# Altium PCB IMX6.PcbDoc (part 1 of 3)
Units mil, origin at the board's own origin, x right, y up, seen from the top; angles counter-clockwise.
Board outline 7950 x 5550 mil, 4 copper layers (Top Layer, GND, VCC, Bottom Layer), stack 30.634 mil thick; 256 components, 328 nets, 1056 pads, 386 vias.
Unrouted connection lines stored in the file: 1.
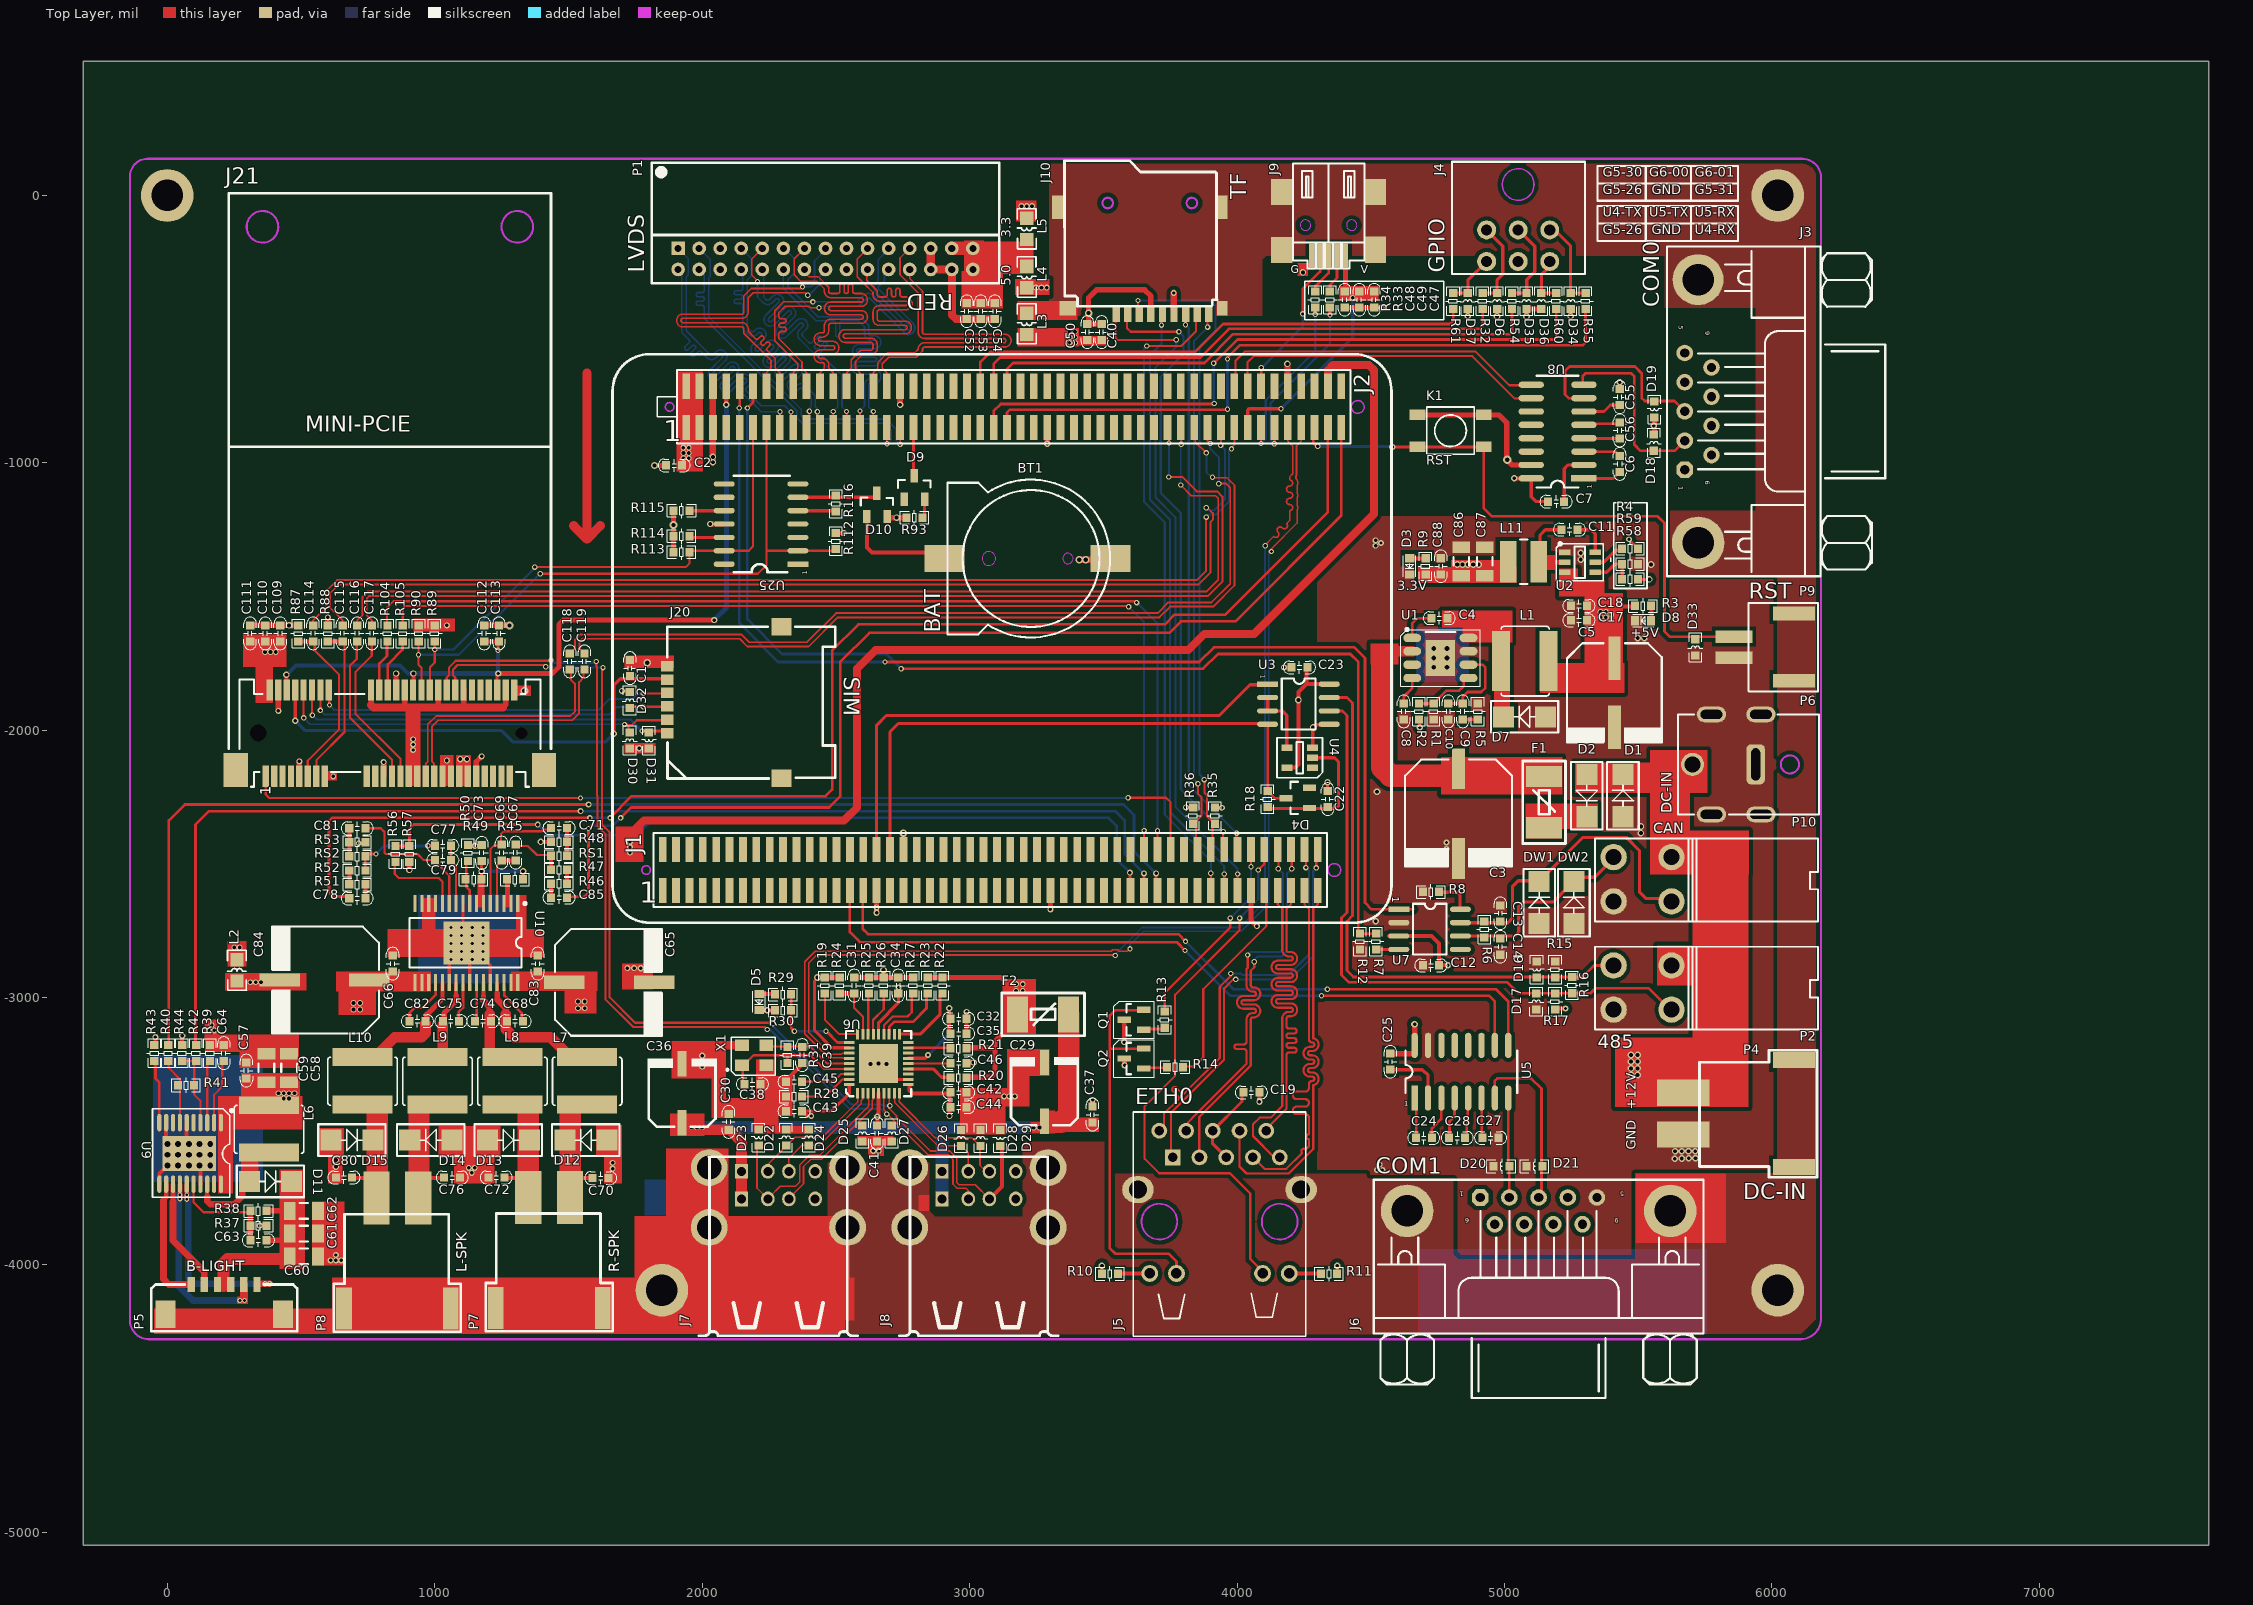
[diagram p0: Top Layer view]
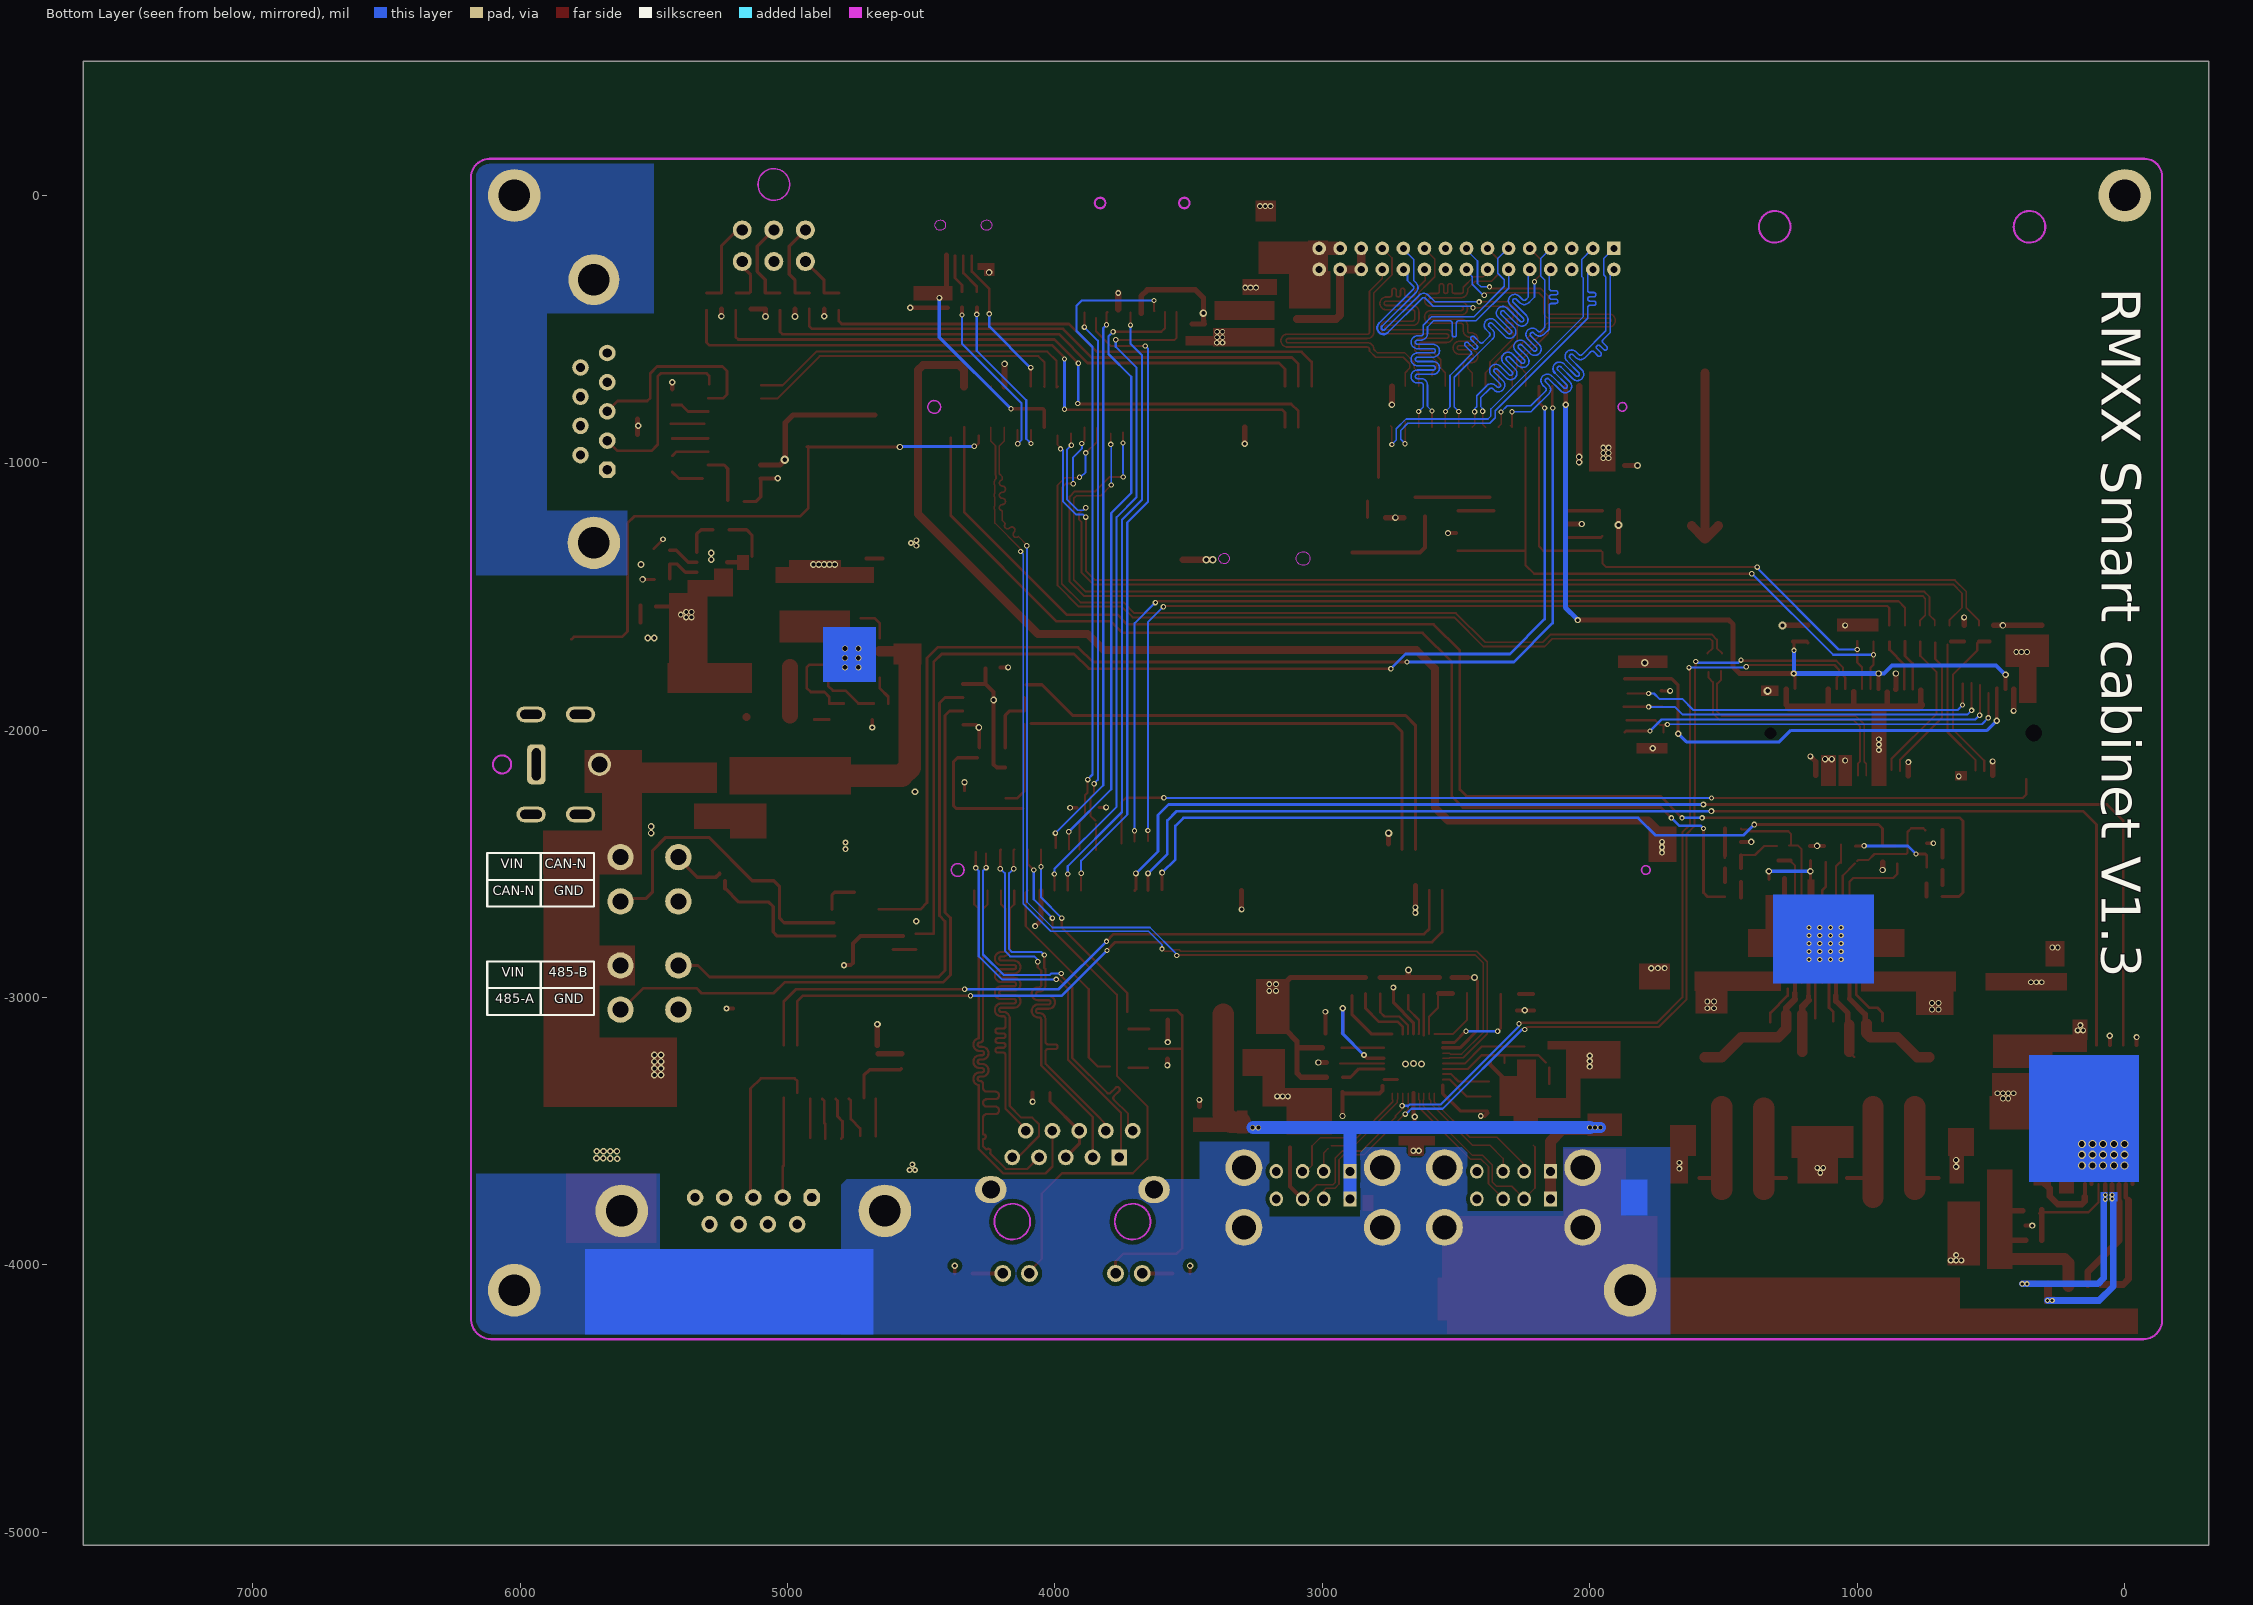
[diagram p1: Bottom Layer view, seen from below]
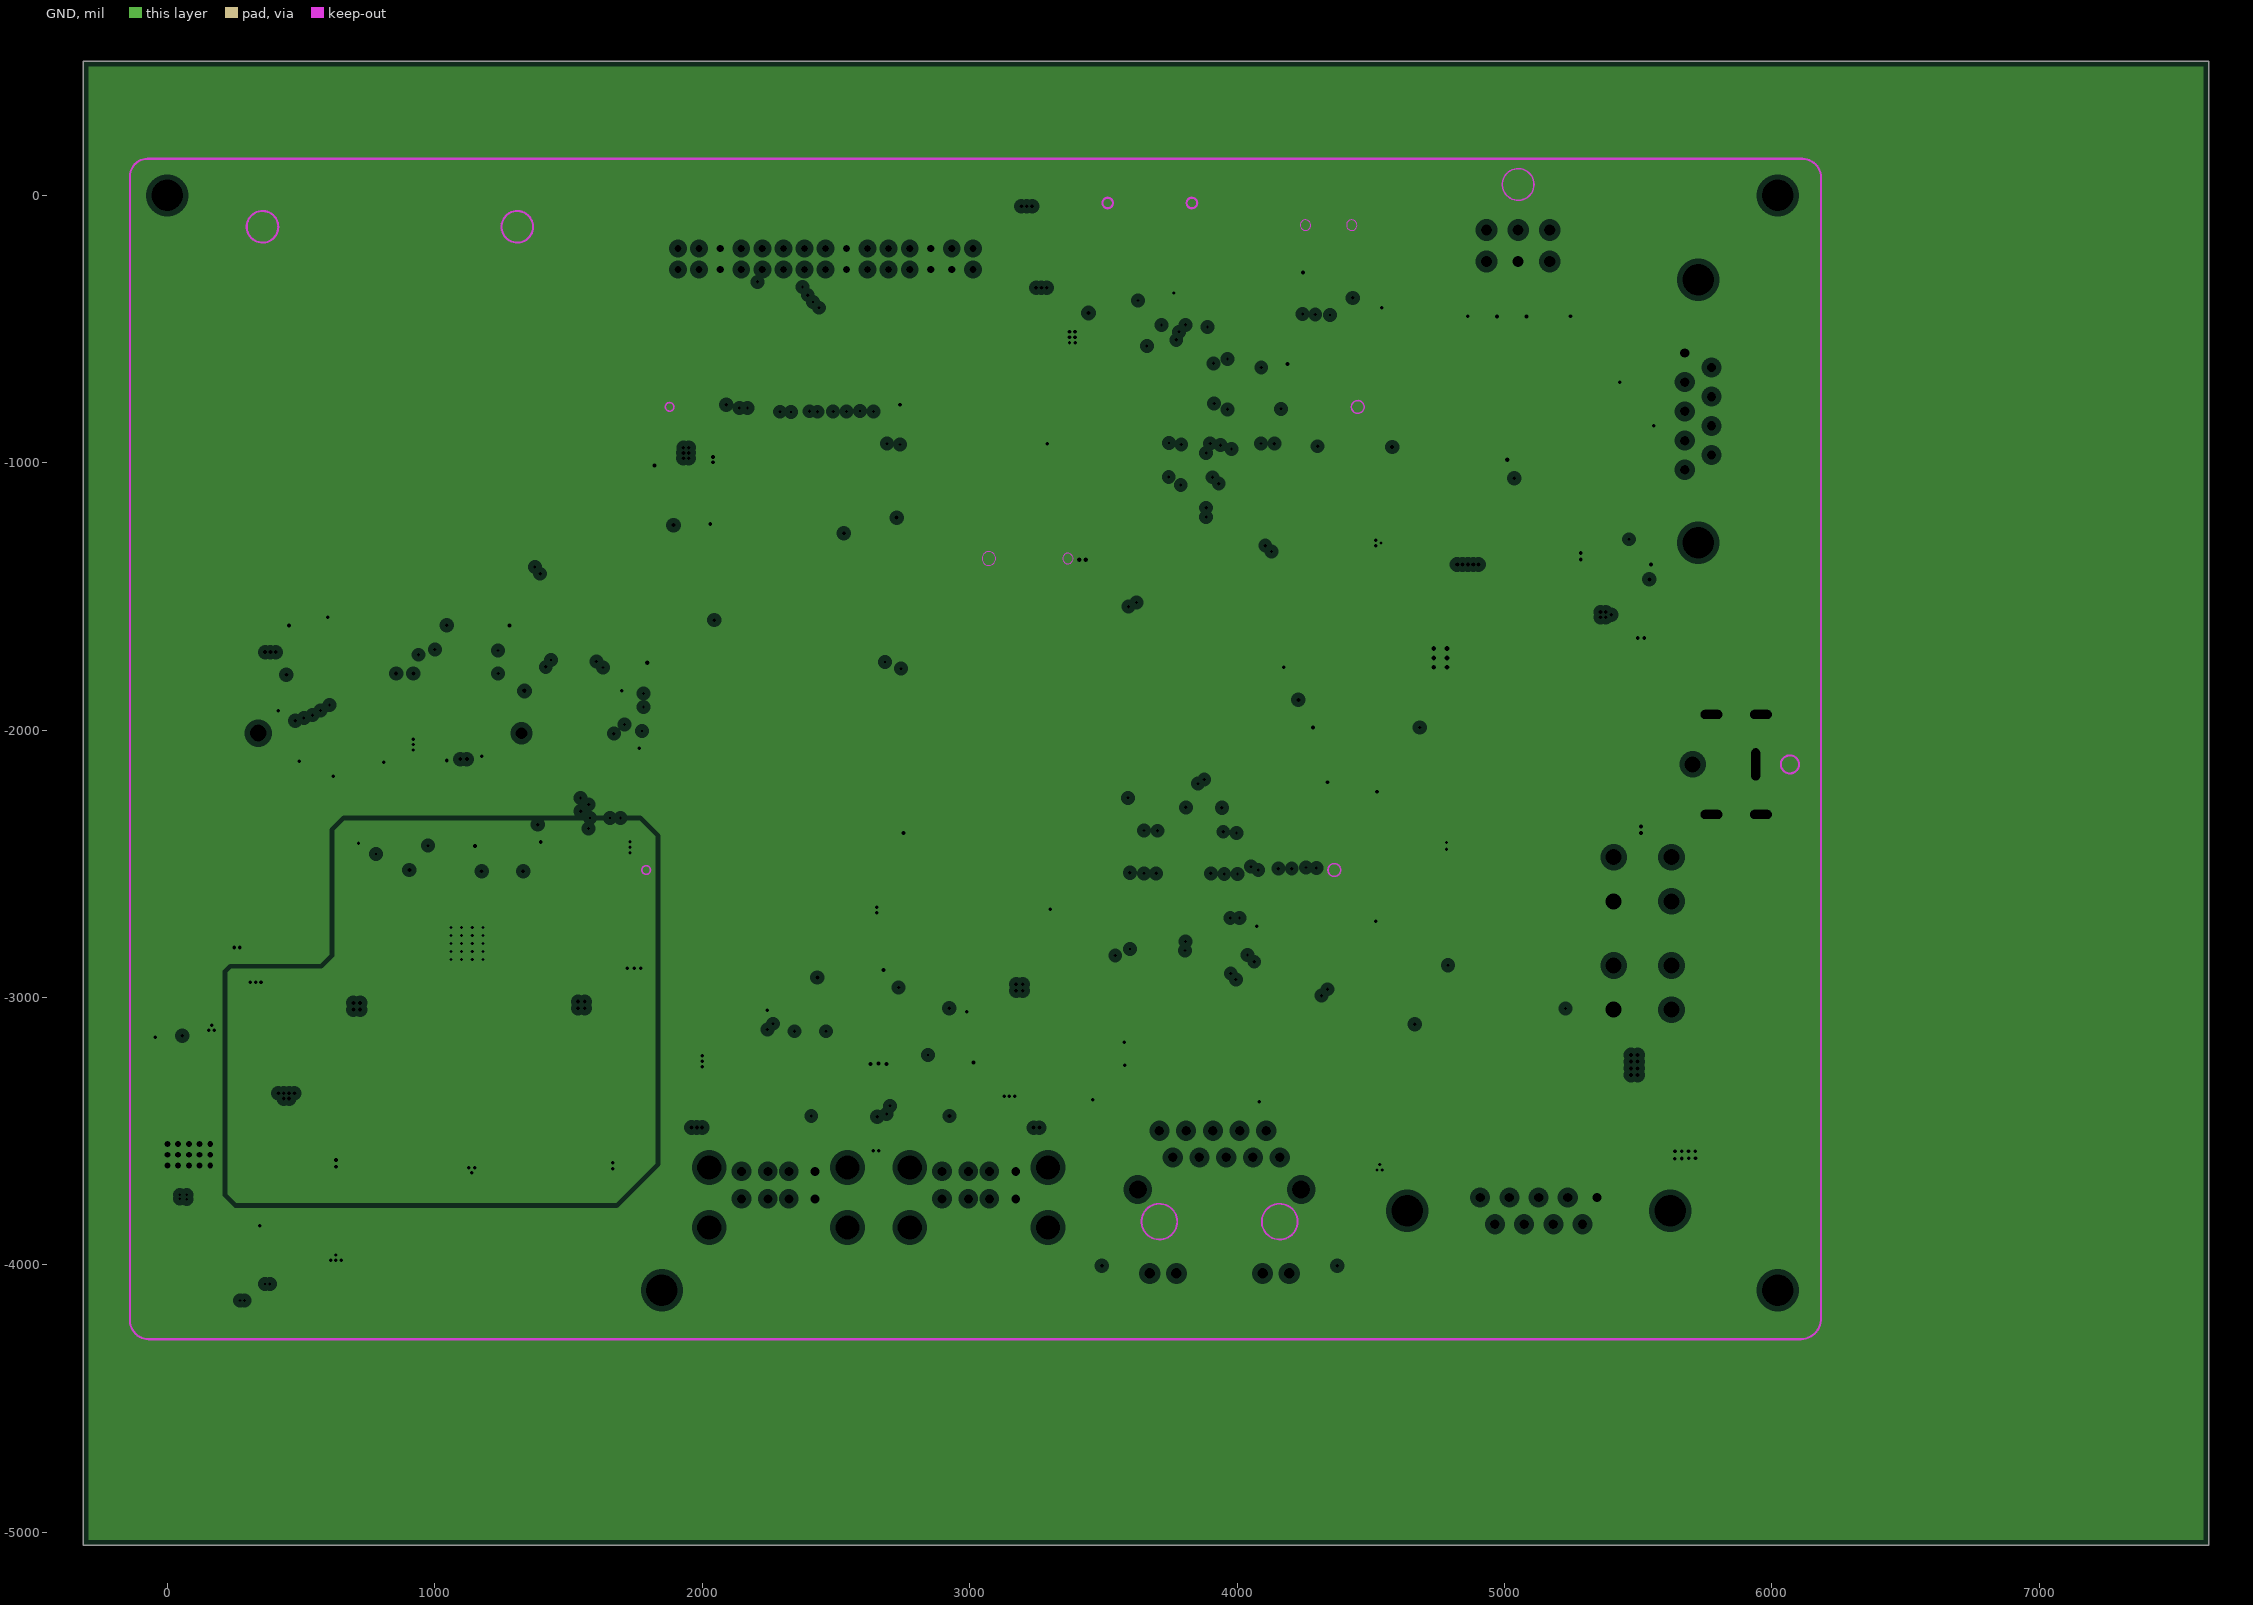
[diagram p2: GND, clearances drawn from the general rule]
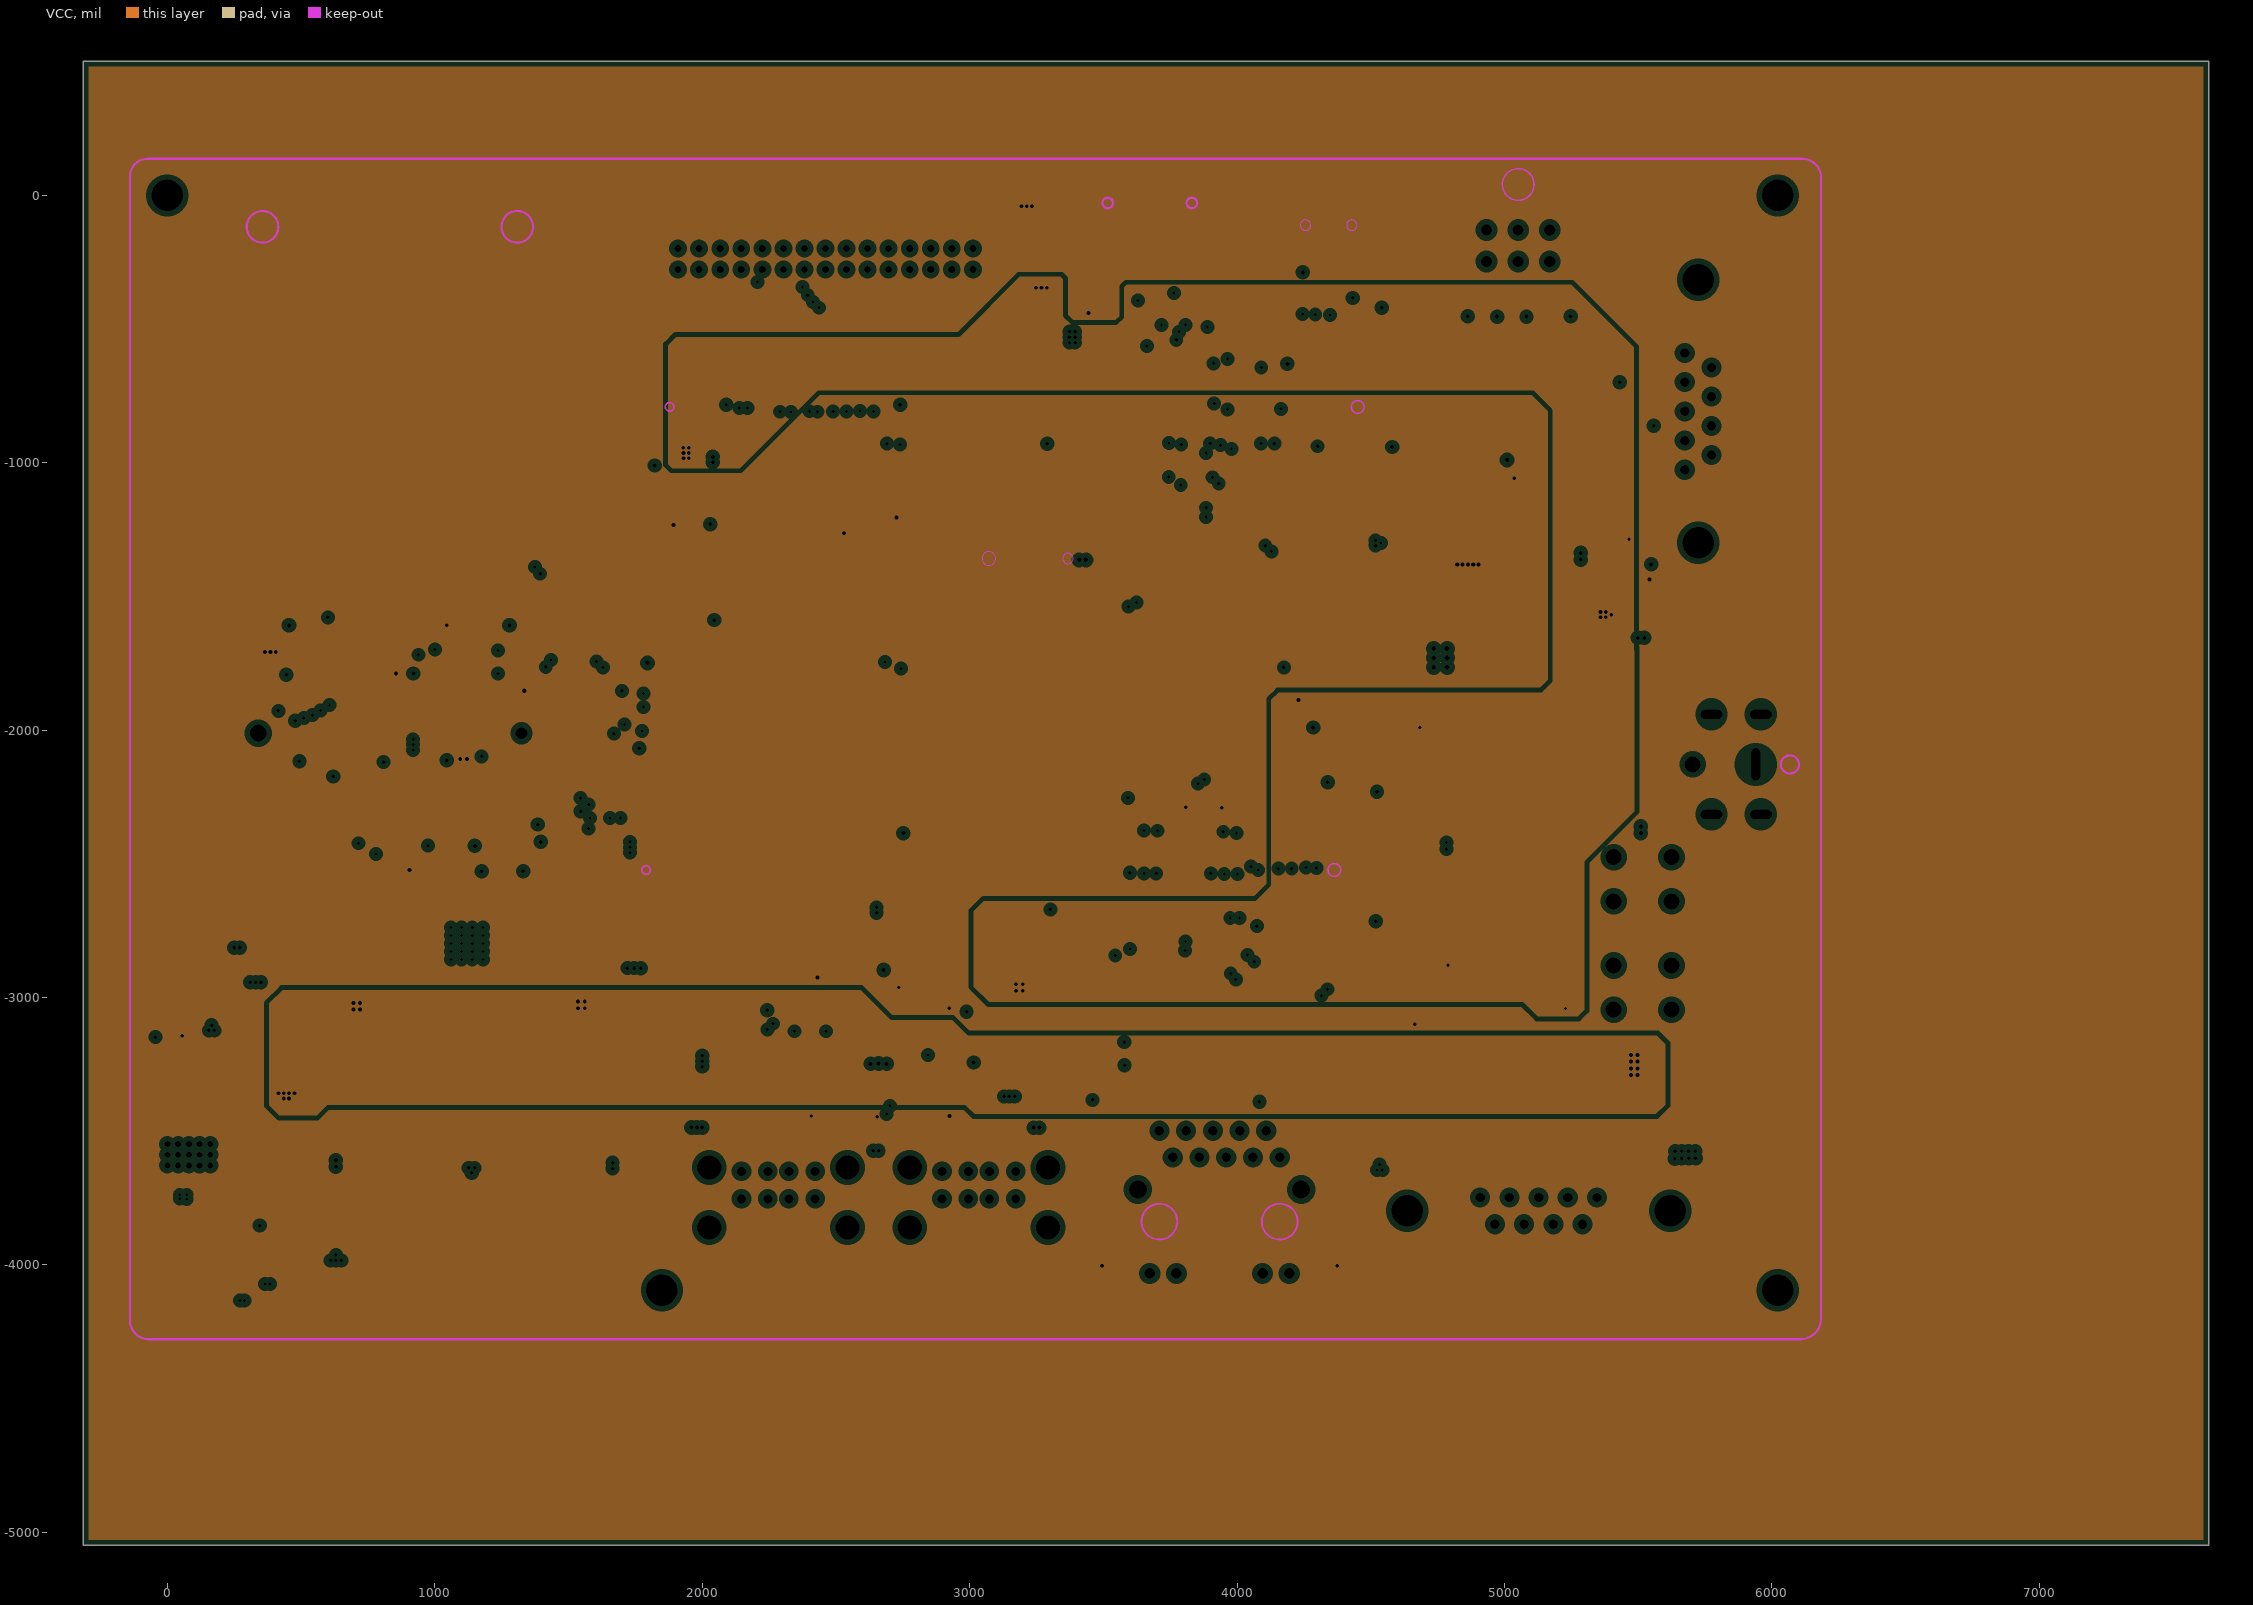
[diagram p3: VCC, clearances drawn from the general rule]

## Layer stack, top to bottom
Top Layer: signal copper 1.4
Dielectric: core 10, FR-4, Dk 4.2
GND: plane copper 1.417, net (Multiple Nets)
Dielectric: prepreg 5, Dk 4.2
VCC: plane copper 1.417, net (Multiple Nets)
Dielectric: core 10, Dk 4.2
Bottom Layer: signal copper 1.4

## Board outline
-315.52,502 7634.48,502 7634.48,-5048 -315.52,-5048

## Design rules (kind name [scope] priority, off if disabled: settings)
Clearance [All] p1 off: gap=15
ComponentClearance [All] p1 off: gap=0 collisioncheckmode=3 verticalgap=0
DiffPairsRouting [All] p1: maxlimit=10 minlimit=8 mostfreqgap=8 maxuncoupledlength=500
HoleSize [All] p1: absolutevalues=TRUE maxlimit=300 minlimit=1 maxpercent=80.000 minpercent=20.000
PlaneClearance [All] p1: clearance=20
PlaneConnect [All] p1: planeconnectstyle=Direct reliefexpansion=20 reliefentries=4 reliefconductorwidth=12 reliefairgap=10
PolygonConnect [All] p1: connectstyle=Direct reliefconductorwidth=15 reliefentries=4 polygonreliefangle="90 Angle"
RoutingVias [All] p1: holewidth=12 width=20 viastyle="Through Hole" minholewidth=8 minwidth=16 maxholewidth=200 maxwidth=300
SolderMaskExpansion [All] p1: expansion=4
TestPointUsage FabricationTestPointUsage [All] p1: valid=0 allowmultiple=FALSE
Testpoint FabricationTestpoint [(IsPad And (OnTopLayer Or OnBottomLayer))] p1: side=3 testpointundercomponent=TRUE minsize=40 maxsize=100 preferedsize=60 minholesize=0 maxholesize=40 preferedholesize=32 testpointgrid=1 style=297 order=0-112345678
Width [All] p1: maxlimit=200 minlimit=6 preferedwidth=10 minimp=50.000000 maximp=50.000000 favimp=50.000000
14 further rules are at their usual default settings.

## Classes and differential pairs
component class 4.CAN: C12 C13 C14 DW1 DW2 P10 R6 R7 R8 R12 U7
component class 10.LVDS: C52 C53 C54 C57 C58 C59 C60 C61 C62 C63 C64 D11 L4 L5 L6 P1 P5 R37 R38 R39 R40 R41 R42 R43 R44 U9
component class 12.WTD&RTC: BT1 D9 D10 D33 K1 P9 R93 R112 R113 R114 R115 R116 U25
component class 8.SATA&TFCARD: C40 C50 J10 R35 R36
component class 5.USB: C29 C30 C31 C32 C34 C35 C36 C37 C38 C39 C41 C42 C43 C44 C45 C46 C47 C48 C49 D5 D22 D23 D24 D25 D26 D27 D28 D29 F2 J7 J8 J9 R19 R20 R21 R22 R23 R24 R25 R26 R27 R28 R29 R30 R31 R33 R34 U6 X1
component class 3.UART: C6 C7 C22 C23 C24 C25 C27 C28 C55 C56 D4 D16 D17 D18 D19 D20 D21 J3 J6 R15 R16 R17 R18 U3 U4 U5 U8
component class 2.ETH: C19 J5 Q1 Q2 R10 R11 R13 R14
component class 1.POWER: C3 C4 C5 C8 C9 C10 C11 C17 C18 C86 C87 C88 D1 D2 D3 D7 D8 F1 L1 L2 L3 L11 P2 P4 P6 R1 R2 R3 R4 R5 R9 R58 R59 U1 U2
component class 11.EX-MODULE: C65 C66 C67 C68 C69 C70 C71 C72 C73 C74 C75 C76 C77 C78 C79 C80 C81 C82 C83 C84 C85 D12 D13 D14 D15 L7 L8 L9 L10 P7 P8 R45 R46 R47 R48 R49 R50 R51 R52 R53 R56 R57 RS1 RS2 U10
component class 0.CONNECTOR: C2 D6 D34 D35 D36 D37 J1 J2 J4 R32 R54 R55 R60 R61
component class 7.MINIPCIE: C1 C109 C110 C111 C112 C113 C114 C115 C116 C117 C118 C119 D30 D31 D32 J20 J21 R87 R88 R89 R90 R104 R105
differential pair CAN1: +CAN1_P -CAN1_N
differential pair USB_PORT4: +USB_PORT4_P -USB_PORT4_N
differential pair USB_PORT3: +USB_PORT3_P -USB_PORT3_N
differential pair USB_PORT2: +USB_PORT2_P -USB_PORT2_N
differential pair USB_PORT1: +USB_PORT1_P -USB_PORT1_N
differential pair USB_OTG_D: +USB_OTG_D_P -USB_OTG_D_N
differential pair USB_H1_D: +USB_H1_D_P -USB_H1_D_N
differential pair TRX3: +TRX3_P -TRX3_N
differential pair TRX2: +TRX2_P -TRX2_N
differential pair TRX1: +TRX1_P -TRX1_N
differential pair TRX0: +TRX0_P -TRX0_N
differential pair LVDS1_TX3: +LVDS1_TX3_P -LVDS1_TX3_N
differential pair LVDS1_TX2: +LVDS1_TX2_P -LVDS1_TX2_N
differential pair LVDS1_TX1: +LVDS1_TX1_P -LVDS1_TX1_N
differential pair LVDS1_TX0: +LVDS1_TX0_P -LVDS1_TX0_N
differential pair LVDS1_CLK: +LVDS1_CLK_P -LVDS1_CLK_N
differential pair LVDS0_TX3: +LVDS0_TX3_P -LVDS0_TX3_N
differential pair LVDS0_TX2: +LVDS0_TX2_P -LVDS0_TX2_N
differential pair LVDS0_TX1: +LVDS0_TX1_P -LVDS0_TX1_N
differential pair LVDS0_TX0: +LVDS0_TX0_P -LVDS0_TX0_N
differential pair LVDS0_CLK: +LVDS0_CLK_P -LVDS0_CLK_N
differential pair CLK1O: +CLK1O_P -CLK1O_N
differential pair CLK1: +CLK1_P -CLK1_N
differential pair PCIE_RXO: +PCIE_RXO_P -PCIE_RXO_N
differential pair PCIE_RX: +PCIE_RX_P -PCIE_RX_N
differential pair PCIE_TXO: +PCIE_TXO_P -PCIE_TXO_N
differential pair PCIE_TX: +PCIE_TX_P -PCIE_TX_N

## Components (designator, comment, footprint, x,y, rotation, side; value= is the part's Value field where it differs from the comment)
BT1 "" CR1220 3229.48,-1358 r180 top
C1 "0.1uF" 0603C 1729.48,-1768 r180 top
C2 "0.1uF" 0603C 1894.8,-1009.72 r270 top
C3 "1000uF/25V" C10-SMD 4828.48,-2310 r270 top
C4 "Cap" 0603C 4756.48,-1581 r270 top
C5 "Cap Pol3" C8X10-SMD 5411.48,-1860 r270 top
C6 "0.1uF" 0603C 5431.48,-1004 r180 top
C7 "0.1uF" 0603C 5193.48,-1145 r270 top
C8 "Cap" 0603C 4623.48,-1930 r0 top
C9 "Cap" 0603C 4844.48,-1930 r180 top
C10 "Cap" 0603C 4790.48,-1930 r180 top
C11 "0.1uF" 0603C 5243.48,-1250 r90 top
C12 "0.1uF" 0603C 4725,-2880 r270 top
C13 "22pF" 0603C 4985,-2685 r0 top
C14 "22pF" 0603C 4985,-2810 r180 top
C17 "10uF" 0603C 5278.48,-1589 r270 top
C18 "0.1uF" 0603C 5278.48,-1535 r270 top
C19 "0.1uF" 0603C 4053.48,-3355 r90 top
C22 "1nF" 0603C 4339.48,-2258 r0 top
C23 "0.1uF" 0603C 4233.48,-1765 r270 top
C24 "0.1uF" 0603C 4698.48,-3525 r90 top
C25 "0.1uF" 0603C 4573.48,-3240 r180 top
C27 "0.1uF" 0603C 4948.48,-3525 r90 top
C28 "0.1uF" 0603C 4823.48,-3525 r90 top
C29 "220uF/16V" C6.3X5.4-SMD 3279.48,-3353 r90 top
C30 "0.1uF" 0603C 2098.48,-3465 r0 top
C31 "0.1uF" 0603C 2568.48,-2955 r0 top
C32 "4.7uF" 0603C 2958.48,-3080 r270 top
C34 "4.7uF" 0603C 2733.48,-2955 r0 top
C35 "0.1uF" 0603C 2958.48,-3135 r270 top
C36 "220uF/16V" C6.3X5.4-SMD 1924.48,-3358 r90 top
C37 "0.1uF" 0603C 3459.48,-3438 r0 top
C38 "22pF" 0603C 2187.48,-3324 r270 top
C39 "22pF" 0603C 2373.48,-3215 r180 top
C40 "0.1uF" 0603C 3493.48,-511 r180 top
C41 "0.1uF" 0603C 2653.48,-3508 r180 top
C42 "0.1uF" 0603C 2958.48,-3355 r270 top
C43 "0.1uF" 0603C 2343.48,-3425 r90 top
C44 "4.7uF" 0603C 2958.48,-3410 r270 top
C45 "1uF" 0603C 2343.48,-3315 r90 top
C46 "1uF" 0603C 2958.48,-3245 r270 top
C47 "0.1uF" 0603C 4512.48,-390 r180 top
C48 "22uF" 0603C 4402.48,-390 r180 top
C49 "22uF" 0603C 4457.48,-390 r180 top
C50 "22uF" 0603C 3440.48,-511 r180 top
C52 "0.1uF" 0603C 2989.48,-433 r0 top
C53 "22uF" 0603C 3041.48,-433 r180 top
C54 "22uF" 0603C 3094.48,-433 r180 top
C55 "0.1uF" 0603C 5431.48,-754 r180 top
C56 "0.1uF" 0603C 5431.48,-879 r180 top
C57 "Cap" 0603C 294.48,-3273 r180 top
C58 "Cap" C1206 454.48,-3263 r270 top
C59 "Cap" C1206 369.48,-3263 r270 top
C60 "Cap" C1206 509.48,-3968 r180 top
C61 "Cap" C1206 509.48,-3883 r180 top
C62 "Cap" C1206 509.48,-3798 r180 top
C63 "Cap" 0603C 339.48,-3908 r90 top
C64 "Cap" 0603C 210.48,-3208 r0 top
C65 "1000uF/25V" C10-SMD 1649.48,-2943 r0 top
C66 "0.22uF" 0603C 842,-2873 r180 top
C67 "1uF" 0603C 1301.48,-2458 r0 top
C68 "0.22uF" 0603C 1299.48,-3088 r270 top
C69 "300" 0603C 1249.48,-2458 r180 top
C70 "1uF" 0603C 1620,-3675 r270 top
C71 "1uF" 0603C 1464.48,-2366 r270 top
C72 "1uF" 0603C 1229.48,-3673 r270 top
C73 "1uF" 0603C 1175.48,-2459 r0 top
C74 "0.22uF" 0603C 1179.48,-3088 r90 top
C75 "0.22uF" 0603C 1059.48,-3088 r270 top
C76 "1uF" 0603C 1064.48,-3673 r270 top
C77 "1uF" 0603C 1029.48,-2433 r90 top
C78 "10uF" 0603C 709.48,-2629 r90 top
C79 "300" 0603C 1029.48,-2486 r270 top
C80 "1uF" 0603C 659.48,-3673 r270 top
C81 "1uF" 0603C 709.48,-2367 r90 top
C82 "0.22uF" 0603C 934.48,-3088 r90 top
C83 "0.22uF" 0603C 1384.48,-2873 r180 top
C84 "1000uF/25V" C10-SMD 590,-2935 r180 top
C85 "10uF" 0603C 1464.48,-2626 r270 top
C86 "47uF" C1206 4838.48,-1369 r90 top
C87 "47uF" C1206 4926.48,-1369 r90 top
C88 "0.1uF" 0603C 4762.48,-1387 r180 top
C109 "0.1uF" 0603C 421.48,-1638 r180 top
C110 "0.1uF" 0603C 365.48,-1638 r180 top
C111 "22uF" 0603C 308.48,-1638 r180 top
C112 "0.1uF" 0603C 1184.48,-1638 r180 top
C113 "0.1uF" 0603C 1239.48,-1638 r180 top
C114 "0.1uF" 0603C 544.48,-1638 r0 top
C115 "0.1uF" 0603C 654.48,-1638 r0 top
C116 "0.1uF" 0603C 709.48,-1638 r0 top
C117 "0.1uF" 0603C 764.48,-1638 r0 top
C118 "0.1uF" 0603C 1504.48,-1743 r0 top
C119 "0.1uF" 0603C 1559.48,-1743 r0 top
D1 "SMAJ16A" SMA 5443.48,-2245 r90 top
D2 "SS54" SMA 5308.48,-2245 r270 top
D3 "发光二极管" 0603D 4645.48,-1387 r180 top
D4 "BAT54C" SOT-23#1 4284.48,-2213 r0 top
D5 "发光二极管" 0603D 2212.48,-3017 r180 top
D6 "ESD" 0603L 4973.48,-395 r0 top
D7 "SS54" SMA 5075.48,-1950 r180 top
D8 "发光二极管" 0603D 5518.48,-1590 r90 top
D9 "BAT54C" SOT-23#2 2833.48,-1150 r270 top
D10 "BAT54C" SOT-23#2 2693.48,-1215 r270 top
D11 "SS210" SMA 384.48,-3688 r0 top
D12 "M7" SMA 1564.48,-3533 r180 top
D13 "M7" SMA 1274.48,-3533 r0 top
D14 "M7" SMA 984.48,-3533 r180 top
D15 "M7" SMA 689.48,-3533 r0 top
D16 "ESD" 0603L 5120,-2895 r180 top
D17 "ESD" 0603L 5120,-3015 r0 top
D18 "ESD" 0603L 5560,-925 r0 top
D19 "ESD" 0603L 5560,-800 r180 top
D20 "ESD" 0603L 4988.48,-3630 r90 top
D21 "ESD" 0603L 5112.48,-3630 r90 top
D22 "ESD" 0603L 2314.48,-3523 r0 top
D23 "ESD" 0603L 2209.48,-3523 r180 top
D24 "ESD" 0603L 2399.48,-3523 r0 top
D25 "ESD" 0603L 2599.48,-3508 r0 top
D26 "ESD" 0603L 2968.48,-3525 r0 top
D27 "ESD" 0603L 2709.48,-3508 r0 top
D28 "ESD" 0603L 3041.48,-3525 r0 top
D29 "ESD" 0603L 3113.48,-3525 r180 top
D30 "ESD" 0603L 1729.48,-2038 r0 top
D31 "ESD" 0603L 1799.48,-2038 r180 top
D32 "ESD" 0603L 1729.48,-1888 r0 top
D33 "ESD" 0603L 5715,-1690 r0 top
D34 "ESD" 0603L 5248.48,-395 r0 top
D35 "ESD" 0603L 5083.48,-395 r0 top
D36 "ESD" 0603L 5138.48,-395 r0 top
D37 "ESD" 0603L 4863.48,-395 r0 top
DW1 "SMAJ6.8CA" SMA 5130,-2645 r90 top
DW2 "SMAJ6.8CA" SMA 5260,-2645 r90 top
F1 "2A  FUSE" 1812F 5148.48,-2365 r90 top
F2 "2A  FUSE" 1812F 3179.48,-3063 r0 top
J1 "CON50X2" IDC50X2-1.27MM_SMT 3077,-2523 r0 top locked
J2 "CON50X2" IDC50X2-1.27MM_SMT 3164.8,-790.72 r0 top locked
J3 "DB9" DB-9/M#1 5674.48,-1026 r180 top
J4 "GPIO" 5557-6-small 5051.48,-129 r180 top (schematic designator GPIO)
J5 "48F-01GY2DPL2NL" RJ45C-48F-01GY2DPL2NL 3709.48,-3498 r0 top locked
J6 "DB9" DB-9/M#2 4909.48,-3748 r90 top
J7 "USB-D" USB-D 2284.48,-3748 r180 top
J8 "USB-D" USB-D 3034.48,-3748 r180 top
J9 "USB_AB" "MINI USB B" 4342.48,-225 r180 top locked
J10 "TF-CARD" TF-CARD 3605.48,-370 r270 top
J20 "MICRO-SIM" MACRO-SIM 2296.48,-1613 r270 top
J21 "Mini PCI Express" MINI-PCIE 831.48,-2011 r0 top locked
K1 "KEY" SS-SPB-4.5 4798.48,-880 r0 top
L1 "Inductor" L-6045 4987.48,-1742 r0 top
L2 "电感" 0805L 259.48,-2858 r0 top
L3 "电感" 0805L 3213.48,-520 r180 top
L4 "NC" 0805L 3213.48,-345 r180 top
L5 "电感" 0805L 3213.48,-165 r180 top
L6 "Inductor" L-6045 379.48,-3403 r270 top
L7 "10UH" L-6045 1569.48,-3223 r270 top
L8 "10UH" L-6045 1289.48,-3223 r270 top
L9 "10UH" L-6045 1009.48,-3223 r270 top
L10 "10UH" L-6045 729.48,-3223 r270 top
L11 "3.3uH" L4030 5071.48,-1370 r0 top
P1 "PHD30AW" 2.0-15P*2 1909.48,-198 r0 top locked
P2 "POWIN" 5569 5408.48,-2880 r270 top
P4 "POW-IN" VH3.96-2P-SMT 5669.48,-3512 r90 top
P5 "Header 6" 1.25MM-6P 334.48,-4073 r0 top
P6 "POW-IN" DC-5525 5959.48,-1941 r270 top
P7 "CON2" VH3.96-2P-SMT 1349.48,-3748 r0 top
P8 "CON2" VH3.96-2P-SMT 781.48,-3750 r0 top
P9 "RST" PH2.0-2-SMT 5858.48,-1650 r270 top
P10 "CAN" 5569 5408.48,-2475 r270 top
Q1 "9012" SOT-23-PMOS 3614.48,-3083 r180 top
Q2 "9012" SOT-23-PMOS 3614.48,-3228 r180 top
R1 "Res Semi" 0603R 4735.48,-1930 r180 top
R2 "Res Semi" 0603R 4680.48,-1930 r0 top
R3 "Res1" 0603R 5518.48,-1535 r90 top
R4 "10K" 0603R 5470.48,-1321 r270 top
R5 "Res Semi" 0603R 4900.48,-1930 r0 top
R6 "120" 0603R 4925,-2745 r180 top
R7 "10K" 0603R 4520,-2790 r0 top
R8 "1K" 0603R 4725,-2605 r90 top
R9 "1K" 0603R 4705.48,-1387 r0 top
R10 "1K" 0603R 3524.48,-4033 r270 top
R11 "1K" 0603R 4344.48,-4033 r90 top
R12 "20K" 0603R 4460,-2790 r180 top
R13 "4.7K" 0603R 3729.48,-3083 r180 top
R14 "4.7K" 0603R 3768.48,-3260 r90 top
R15 "1K" 0603R 5190,-2895 r180 top
R16 "120(NC)" 0603R 5253.48,-2954 r180 top
R17 "1K" 0603R 5190,-3015 r180 top
R18 "20K" 0603R 4114.48,-2258 r180 top
R19 "0R" 0603R 2458.48,-2955 r180 top
R20 "10K" 0603R 2958.48,-3300 r270 top
R21 "10K" 0603R 2958.48,-3190 r270 top
R22 "10K" 0603R 2898.48,-2955 r0 top
R23 "10K" 0603R 2843.48,-2955 r0 top
R24 "100K" 0603R 2513.48,-2955 r0 top
R25 "100K" 0603R 2623.48,-2955 r180 top
R26 "100K" 0603R 2678.48,-2955 r180 top
R27 "100K" 0603R 2788.48,-2955 r180 top
R28 "12K 1%" 0603R 2343.48,-3370 r90 top
R29 "1K" 0603R 2301.48,-2988 r90 top
R30 "100K" 0603R 2301.48,-3048 r270 top
R31 "1M" 0603R 2318.48,-3215 r180 top
R32 "100R" 0603R 4918.48,-395 r0 top
R33 "33R" 0603R 4347.48,-390 r0 top
R34 "33R" 0603R 4292.48,-390 r0 top
R35 "10K" 0603R 3917.48,-2320 r180 top
R36 "10K" 0603R 3835.48,-2320 r180 top
R37 "Res1" 0603R 339.48,-3853 r270 top
R38 "Res1" 0603R 339.48,-3798 r90 top
R39 "Res1" 0603R 158.48,-3208 r0 top
R40 "Res1" 0603R 2.48,-3208 r180 top
R41 "Res1" 0603R 69.48,-3328 r90 top
R42 "Res1" 0603R 106.48,-3208 r180 top
R43 "Res1" 0603R -49.52,-3208 r180 top
R44 "Res1" 0603R 54.48,-3208 r180 top
R45 "20K" 0603R 1299.48,-2558 r270 top
R46 "330R" 0603R 1464.48,-2574 r90 top
R47 "4.7K" 0603R 1464.48,-2522 r90 top
R48 "4.7K" 0603R 1464.48,-2418 r270 top
R49 "100K" 0603R 1144.48,-2558 r90 top
R50 "20K" 0603R 1123.48,-2459 r180 top
R51 "330R" 0603R 709.48,-2577 r270 top
R52 "4.7K" 0603R 709.48,-2525 r270 top
R53 "4.7K" 0603R 709.48,-2419 r90 top
R54 "100R" 0603R 5028.48,-395 r180 top
R55 "100R" 0603R 5303.48,-395 r0 top
R56 "2K" 0603R 852.48,-2463 r0 top
R57 "10K" 0603R 904.48,-2463 r180 top
R58 "33K" 0603R 5470.48,-1435 r270 top
R59 "10K" 0603R 5470.48,-1379 r270 top
R60 "100R" 0603R 5193.48,-395 r180 top
R61 "100R" 0603R 4808.48,-395 r180 top
R87 "49.9R  1%" 0603R 489.48,-1638 r0 top
R88 "49.9R  1%" 0603R 599.48,-1638 r0 top
R89 "4.7K(NC)" 0603R 998.48,-1638 r0 top
R90 "4.7K(NC)" 0603R 939.48,-1638 r0 top
R93 "10K" 0603R 2793.48,-1205 r270 top
R104 "0R(NC)" 0603R 822.48,-1638 r0 top
R105 "0R(NC)" 0603R 879.48,-1638 r0 top
R112 "4.7K(NC)" 0603R 2499.48,-1293 r180 top
R113 "4.7K(NC)" 0603R 1922.48,-1334 r270 top
R114 "10K" 0603R 1922.48,-1274 r270 top
R115 "10K" 0603R 1922.48,-1179 r270 top
R116 "0(NC)" 0603R 2499.48,-1153 r180 top
RS1 "NC" 0603R 1464.48,-2470 r90 top
RS2 "NC" 0603R 709.48,-2472 r270 top
U1 "TPS54331" SOP8-POW 4760.48,-1730 r0 top
U2 "TPS562201" SOT23-6-DC 5282.48,-1372 r0 top
U3 "MAX485ESA" SOP8-1.27 4114.48,-1828 r0 top
U4 "SN74LVC1G04" SOT23-5N 4234.48,-2103 r180 top
U5 "SP3232EEN" SOIC16-1.27 4813.48,-3280 r90 top
U6 "USB2514BI" QFN-36 2659.48,-3248 r90 top
U7 "TJA1050" SOP8-1.27 4605,-2670 r0 top
U8 "SP3232EEN" SOIC16-1.27 5201.48,-909 r180 top
U9 "TPS61194" HTTSOP-20 199.48,-3468 r270 top
U10 "TPA3116" HTSSOP-32 1309.48,-2648 r180 top
U25 "RX8025-SA" SOP14-1.27 2357.48,-1379 r180 top
X1 "24M" OSC4-3225 2148.48,-3254 r0 top

## Footprints (in the part's own frame and the unit in brackets; to place one, negate y for a bottom-side part, rotate by r counter-clockwise, add the part's x,y. Pads: shape width x height; smd on the part's side, far side on the other; paste and mask are expansions set on the pad)
1.25MM-6P [mm]
  rect 1.9x2.6 smd: 0(-8.7,-2.835) 0(2.45,-2.835)
  rect 0.7x1.4 smd: 1(-6.25,0) 2(-5,0) 3(-3.75,0) 4(-2.5,0) 5(-1.25,0) 6(0,0)
  silkscreen extent -10.03,-4.44 3.81,0
2.0-15P*2 [mm]
  rect 1.301x1.301 hole 0.68: 1(0,0)
  round 1.301 hole 0.68: 2(0,-2) 3(2,0) 4(2,-2) 5(4,0) 6(4,-2) 7(6,0) 8(6,-2) 9(8,0) 10(8,-2) 11(10,0) 12(10,-2) 13(12,0) 14(12,-2) 15(14,0) 16(14,-2) 17(16,0) 18(16,-2) 19(18,0) 20(18,-2) 21(20,0) 22(20,-2) 23(22,0) 24(22,-2) 25(24,0) 26(24,-2) 27(26,0) 28(26,-2) 29(28,0) 30(28,-2)
  silkscreen extent -2.5,-3.3 30.5,8.15
0603C [mil]
  rect 31.5x30 smd: 1(0,30) 2(0,-30)
  silkscreen extent -24,-60 24,60
0603D [mil]
  rect 35.43x30 smd: A(0,-30) K(0,30)
  silkscreen extent -24,-40 24,39
0603L [mil]
  rect 31.5x30 smd: 1(-0.91,-29.91) 2(-0.91,30.09)
  silkscreen extent -28,-54 27,54
0603R [mil]
  rect 31.5x30 smd: 1(0,30) 2(0,-30)
  silkscreen extent -28,-53 28,53
0805L [mil]
  rect 50x50 smd: 1(0,0) 2(0,-80)
  silkscreen extent -35,-115 36,35
1812F [mm]
  rect 2x3.4 smd: 1(0,0) 2(4.85,0)
  silkscreen extent -1.5,-2.03 6.35,2.03
5557-6-small [mm]
  round 1.8 hole 1.05: 1(3,0) 2(0,0) 3(-3,0) 4(-3,3) 5(0,3) 6(3,3)
  Keep-Out Layer circle w0.152: c0,-4.32 r1.505
  silkscreen extent -6.35,-6.48 6.3,4.19
5569 [mm]
  round 2.5 hole 1.524: 1(0,0) 2(4.2,0) 3(4.2,5.5) 4(0,5.5)
  silkscreen extent -1.78,-1.78 6.1,19.43
C6.3X5.4-SMD [mm]
  rect 2.4x0.85 smd: 1(-2.794,0) 2(2.794,0)
  silkscreen extent -3.17,-3.3 3.3,3.3, body extent -3.24,-3.18 3.24,3.18, height 3.5
C8X10-SMD [mm]
  rect 4.1x1.148 smd: 1(-3.277,0)
  rect 4.1x1.25 smd: 2(3.277,0)
  silkscreen extent -4.7,-4.5 4.7,4.5, body extent -4.65,-4.25 4.65,4.25, height 10.5
C10-SMD [mm]
  rect 3.85x1.25 smd: 1(-4.191,0) 2(4.318,0)
  silkscreen extent -5.08,-5.08 5.08,5.08
C1206 [mm] "Chip Capacitor, Body 3.2x1.6mm, IPC High Density"
  rect 1.1x1.7 smd: 1(-1.35,0) 2(1.35,0)
  silkscreen extent -0.4,-0.75 0.4,0.75, body extent -1.7,-0.9 1.7,0.9, height 1.3
CR1220 [mm]
  rect 3.8x2.6 smd: 1(8.23,0) 2(-7.57,0)
  Keep-Out Layer circle w0.1: c-3.5,0 r0.5
  Keep-Out Layer circle w0.1: c4,0 r0.65
  silkscreen extent -7.5,-7.5 7.94,7.5
DB-9/M#1 [mil]
  oct 62x62 hole 35: 1(0,0)
  round 62 hole 35: 2(0,-109.17) 3(0,-218.33) 4(0,-327.5) 5(0,-436.67) 6(-100,-55) 7(-100,-164.17) 8(-100,-273.33) 9(-100,-382.5)
  round 190 hole 118.33: BO1(-50,-710.83)
  round 196.67 hole 118.33: BO2(-50,273.33)
  silkscreen extent -750,-835 67,398
DB-9/M#2 [mil]
  oct 62x62 hole 35: 1(0,0)
  round 62 hole 35: 2(0,-109.17) 3(0,-218.33) 4(0,-327.5) 5(0,-436.67) 6(-100,-55) 7(-100,-164.17) 8(-100,-273.33) 9(-100,-382.5)
  round 196.67 hole 118.33: BO1(-50,-710.83) BO2(-50,273.33)
  silkscreen extent -750,-835 67,398
DC-5525 [mm]
  oval 1.5x2.8 hole 0.85 slot 2.06 at 90 deg: 1(0,0) 1(0,-4.7) 1(9.5,-4.7) 1(9.5,0)
  rrect50% 3.8x1.75 hole 0.83 slot 3.05 at 0 deg: 1(4.75,-0.5)
  round 2.2 hole 1.5: 2(4.75,-6.5)
  Keep-Out Layer circle w0.2: c4.75,2.75 r0.86
  silkscreen extent 0,-7.87 9.53,5.5
HTSSOP-32 [mm]
  rect 0.3x1.6 smd: 1(0,0) 2(0.65,0) 3(1.3,0) 4(1.95,0) 5(2.6,0) 6(3.25,0) 7(3.9,0) 8(4.55,0) 9(5.2,0) 10(5.85,0) 11(6.5,0) 12(7.15,0) 13(7.8,0) 14(8.45,0) 15(9.1,0) 16(9.75,0) 17(9.75,7.5) 18(9.1,7.5) 19(8.45,7.5) 20(7.8,7.5) 21(7.15,7.5) 22(6.5,7.5) 23(5.85,7.5) 24(5.2,7.5) 25(4.55,7.5) 26(3.9,7.5) 27(3.25,7.5) 28(2.6,7.5) 29(1.95,7.5) 30(1.3,7.5) 31(0.65,7.5) 32(0,7.5)
  rect 4.36x4.11 smd: 33(4.875,3.75)
  silkscreen extent -0.83,-0.12 10.29,6.1
HTTSOP-20 [mm]
  oval 1.65x0.4 smd: 1(0,0) 2(0,-0.65) 3(0,-1.3) 4(0,-1.95) 5(0,-2.6) 6(0,-3.25) 7(0,-3.9) 8(0,-4.55) 9(0,-5.2) 10(0,-5.85) 11(5.842,-5.85) 12(5.842,-5.2) 13(5.842,-4.55) 14(5.842,-3.9) 15(5.842,-3.25) 16(5.842,-2.6) 17(5.842,-1.95) 18(5.842,-1.3) 19(5.842,-0.65) 20(5.842,0)
  rect 3.3x5.08 smd: 21(2.921,-3)
  silkscreen extent -1.32,-6.5 7.07,1.14, body extent 0.64,-6.2 5.08,0.28, height 2.65
IDC50X2-1.27MM_SMT [mm]
  rect 0.74x2.4 smd: 1(-31.115,-1.95) 2(-31.115,1.95) 3(-29.845,-1.95) 4(-29.845,1.95) 5(-28.575,-1.95) 6(-28.575,1.95) 7(-27.305,-1.95) 8(-27.305,1.95) 9(-26.035,-1.95) 10(-26.035,1.95) 11(-24.765,-1.95) 12(-24.765,1.95) 13(-23.495,-1.95) 14(-23.495,1.95) 15(-22.225,-1.95) 16(-22.225,1.95) 17(-20.955,-1.95) 18(-20.955,1.95) 19(-19.685,-1.95) 20(-19.685,1.95) 21(-18.415,-1.95) 22(-18.415,1.95) 23(-17.145,-1.95) 24(-17.145,1.95) 25(-15.875,-1.95) 26(-15.875,1.95) 27(-14.605,-1.95) 28(-14.605,1.95) 29(-13.335,-1.95) 30(-13.335,1.95) 31(-12.065,-1.95) 32(-12.065,1.95) 33(-10.795,-1.95) 34(-10.795,1.95) 35(-9.525,-1.95) 36(-9.525,1.95) 37(-8.255,-1.95) 38(-8.255,1.95) 39(-6.985,-1.95) 40(-6.985,1.95) 41(-5.715,-1.95) 42(-5.715,1.95) 43(-4.445,-1.95) 44(-4.445,1.95) 45(-3.175,-1.95) 46(-3.175,1.95) 47(-1.905,-1.95) 48(-1.905,1.95) 49(-0.635,-1.95) 50(-0.635,1.95) 51(0.635,-1.95) 52(0.635,1.95) 53(1.905,-1.95) 54(1.905,1.95) 55(3.175,-1.95) 56(3.175,1.95) 57(4.445,-1.95) 58(4.445,1.95) 59(5.715,-1.95) 60(5.715,1.95) 61(6.985,-1.95) 62(6.985,1.95) 63(8.255,-1.95) 64(8.255,1.95) 65(9.525,-1.95) 66(9.525,1.95) 67(10.795,-1.95) 68(10.795,1.95) 69(12.065,-1.95) 70(12.065,1.95) 71(13.335,-1.95) 72(13.335,1.95) 73(14.605,-1.95) 74(14.605,1.95) 75(15.875,-1.95) 76(15.875,1.95) 77(17.145,-1.95) 78(17.145,1.95) 79(18.415,-1.95) 80(18.415,1.95) 81(19.685,-1.95) 82(19.685,1.95) 83(20.955,-1.95) 84(20.955,1.95) 85(22.225,-1.95) 86(22.225,1.95) 87(23.495,-1.95) 88(23.495,1.95) 89(24.765,-1.95) 90(24.765,1.95) 91(26.035,-1.95) 92(26.035,1.95) 93(27.305,-1.95) 94(27.305,1.95) 95(28.575,-1.95) 96(28.575,1.95) 97(29.845,-1.95) 98(29.845,1.95) 99(31.115,-1.95) 100(31.115,1.95)
  silkscreen extent -32,-3.5 32,3.5
L4030 [mm]
  rect 1.6x3.9 smd: 1(-1.45,0) 2(1.45,0)
  silkscreen extent -0.35,-2.1 0.35,2.1
L-6045 [mm]
  rect 1.7x5.7 smd: 1(0,0) 2(4.5,0)
  silkscreen extent 0,-3.3 4.57,3.3
MACRO-SIM [mm]
  rect 1x1.2 smd: 1(3.75,-10.86) 2(5.02,-10.86) 3(6.29,-10.86) 4(7.56,-10.86) 5(8.83,-10.86) 6(10.1,-10.86)
  rect 1.7x1.9 smd: ""(0,-0.01) ""(14.4,-0.01)
  silkscreen extent 0,-10.86 14.43,5.1
"MINI USB B" [mm]
  rect 0.5x2.3 smd: 1(-1.6,0) 2(-0.8,0) 3(0,0) 4(0.8,0) 5(1.6,0)
  rect 2x2.5 smd: 6(4.45,-6.038) 7(4.45,-0.538) 8(-4.45,-0.554) 9(-4.45,-6.038)
  Keep-Out Layer circle w0.1: c-2.2,-2.893 r0.5
  Keep-Out Layer circle w0.1: c2.2,-2.893 r0.5
  silkscreen extent -3.4,-8.74 3.4,1.22, body extent -5.32,-8.77 5.38,0.43, height 3.95
MINI-PCIE [mm]
  rect 0.6x2 smd: 1(-11.8,-4.1) 2(-11.4,4.1) 3(-11,-4.1) 4(-10.6,4.1) 5(-10.2,-4.1) 6(-9.8,4.1) 7(-9.4,-4.1) 8(-9,4.1) 9(-8.6,-4.1) 10(-8.2,4.1) 11(-7.8,-4.1) 12(-7.4,4.1) 13(-7,-4.1) 14(-6.6,4.1) 15(-6.2,-4.1) 16(-5.8,4.1) 17(-2.2,-4.1) 18(-1.8,4.1) 19(-1.4,-4.1) 20(-1,4.1) 21(-0.6,-4.1) 22(-0.2,4.1) 23(0.2,-4.1) 24(0.6,4.1) 25(1,-4.1) 26(1.4,4.1) 27(1.8,-4.1) 28(2.2,4.1) 29(2.6,-4.1) 30(3,4.1) 31(3.4,-4.1) 32(3.8,4.1) 33(4.2,-4.1) 34(4.6,4.1) 35(5,-4.1) 36(5.4,4.1) 37(5.8,-4.1) 38(6.2,4.1) 39(6.6,-4.1) 40(7,4.1) 41(7.4,-4.1) 42(7.8,4.1) 43(8.2,-4.1) 44(8.6,4.1) 45(9,-4.1) 46(9.4,4.1) 47(9.8,-4.1) 48(10.2,4.1) 49(10.6,-4.1) 50(11,4.1) 51(11.4,-4.1) 52(11.8,4.1)
  rect 2.3x3.2 smd: 53(-14.65,-3.5) 54(14.65,-3.5)
  rrect70% 0x0 hole 1.6: 55(-12.5,0)
  rrect70% 0x0 hole 1.1: 56(12.5,0)
  Keep-Out Layer circle w0.203: c12.1,48.1 r1.5
  Keep-Out Layer circle w0.203: c-12.1,48.1 r1.5
  silkscreen extent -15.3,-5.1 15.3,51.3
OSC4-3225 [mm]
  rect 1.3x1.1 smd: 1(0,0) 2(2.3,0) 3(2.3,1.9) 4(0,1.9)
  silkscreen extent -1.49,-0.91 3.17,2.67
PH2.0-2-SMT [mm]
  rect 1.3x4 smd: 0(-2.2,5.715) 0(4.191,5.715)
  rect 1.2x3.5 smd: 1(0,0) 2(2,0)
  silkscreen extent -3.18,1.4 5.21,8
QFN-36 [mm]
  rect 1x0.28 smd: 1(-2.777,2) 2(-2.777,1.5) 3(-2.777,1) 4(-2.777,0.5) 5(-2.777,0) 6(-2.777,-0.5) 7(-2.777,-1) 8(-2.777,-1.5) 9(-2.777,-2) 19(2.823,-2) 20(2.823,-1.5) 21(2.823,-1) 22(2.823,-0.5) 23(2.823,0) 24(2.823,0.5) 25(2.823,1) 26(2.823,1.5) 27(2.823,2)
  rect 0.28x1 smd: 10(-1.977,-2.8) 11(-1.477,-2.8) 12(-0.977,-2.8) 13(-0.477,-2.8) 14(0.023,-2.8) 15(0.523,-2.8) 16(1.023,-2.8) 17(1.523,-2.8) 18(2.023,-2.8) 28(2.023,2.8) 29(1.523,2.8) 30(1.023,2.8) 31(0.523,2.8) 32(0.023,2.8) 33(-0.477,2.8) 34(-0.977,2.8) 35(-1.477,2.8) 36(-1.977,2.8)
  rect 3.7x3.7 smd: 37(0.023,0)
  silkscreen extent -3.08,-3.1 3.12,3.1
RJ45C-48F-01GY2DPL2NL [mm]
  round 1.5 hole 0.9: 1(0,0) 3(2.54,0) 4(3.81,-2.54) 5(5.08,0) 6(6.35,-2.54) 7(7.62,0) 8(8.89,-2.54) 9(10.16,0) 10(11.43,-2.54)
  rect 1.5x1.5 hole 0.9: 2(1.27,-2.54)
  round 1.6 hole 1: 11(-0.915,-13.565) 12(1.625,-13.565) 13(9.805,-13.565) 14(12.345,-13.565)
  oval 3x2.54 hole 1.7: 15(-2.035,-5.59) 16(13.465,-5.59)
  Keep-Out Layer circle w0.178: c11.43,-8.64 r1.7
  Keep-Out Layer circle w0.178: c0,-8.64 r1.7
  silkscreen extent -2.48,-19.54 13.92,1.77
SMA [mm]
  rect 2x2 smd: A(-2,0) K(2,0)
  silkscreen extent -3.2,-1.5 3.2,1.5
SOIC16-1.27 [mm]
  rect 2.4x0.6 smd: 1(-2.432,3.787)
  oval 2.4x0.6 smd: 2(-2.432,2.517) 3(-2.432,1.247) 4(-2.432,-0.023) 5(-2.432,-1.293) 6(-2.432,-2.563) 7(-2.432,-3.833) 8(-2.432,-5.103) 9(2.568,-5.103) 10(2.568,-3.833) 11(2.568,-2.563) 12(2.568,-1.293) 13(2.568,-0.023) 14(2.568,1.247) 15(2.568,2.517) 16(2.568,3.787)
  silkscreen extent -1.93,-5.96 2.07,4.64
SOP8-1.27 [mm]
  rect 2x0.5 smd: 1(0,0)
  oval 2x0.5 smd: 2(0,-1.27) 3(0,-2.54) 4(0,-3.81) 5(5.85,-3.81) 6(5.85,-2.54) 7(5.85,-1.27) 8(5.85,0)
  silkscreen extent 1.35,-4.29 4.54,0.53
SOP8-POW [mm]
  oval 1.7x0.8 smd: 1(-2.675,1.905) 2(-2.675,0.635) 3(-2.675,-0.635) 4(-2.675,-1.905) 5(2.675,-1.905) 6(2.675,-0.635) 7(2.675,0.635) 8(2.675,1.905)
  rect 2.8x3.4 smd: 9(0,0)
  silkscreen extent -3.78,-2.7 3.77,2.82
SOP14-1.27 [mm]
  rect 2x0.5 smd: 1(0,0)
  oval 2x0.5 smd: 2(0,-1.27) 3(0,-2.54) 4(0,-3.81) 5(0,-5.08) 6(0,-6.35) 7(0,-7.62) 8(7,-7.62) 9(7,-6.35) 10(7,-5.08) 11(7,-3.81) 12(7,-2.54) 13(7,-1.27) 14(7,0)
  silkscreen extent 0.76,-8.38 6.1,0.76
SOT23-5N [mm]
  rect 1.05x0.65 smd: 1(-1.225,0.95) 2(-1.225,0) 3(-1.225,-0.95) 4(1.225,-0.95) 5(1.225,0.95)
  silkscreen extent -2.16,-1.91 2.16,1.91, body extent -0.87,-1.5 0.88,1.5, height 1.1
SOT23-6-DC [mm] "SOT23, 6-Leads, Body 3.0x3.7mm (max), Pitch 0.95mm, IPC Medium Density"
  rect 1.1x0.5 smd: 1(-1.45,0.95) 2(-1.45,0) 3(-1.45,-0.95) 4(1.45,-0.95) 5(1.45,0) 6(1.45,0.95)
  silkscreen extent -2.25,-1.75 2.25,1.88, body extent -0.87,-1.5 0.87,1.5, height 1.1
SOT-23#1 [mil] "SOT23, 3-Leads, Body 3.0x2.6mm (max), Pitch 0.95mm, IPC Medium Density"
  rect 49x24 smd: 1(-14.05,-78.06) 2(-14.05,-2.06) 3(-101.05,-41.06)
  silkscreen extent -85,-101 -56,20
SOT-23#2 [mil]
  rect 50x28 smd: 1(-14.05,-78.06) 2(-14.05,-2.06) 3(-101.05,-41.06)
  silkscreen extent -85,-101 -56,20
SOT-23-PMOS [mm]
  rect 1.25x0.6 smd: 1(-0.925,0.95) 2(-0.925,-0.95) 3(0.925,0)
  silkscreen extent -1.91,-1.78 1.91,1.78, body extent -0.7,-1.5 0.7,1.5, height 1.1
SS-SPB-4.5 [mm]
  rect 1.5x1 smd: 1(-3.15,1.5) 2(3.15,1.5) 3(3.15,-1.5) 4(-3.15,-1.5)
  silkscreen extent -2.25,-2.25 2.25,2.25
TF-CARD [mm]
  rect 1.6x0.7 smd: 1(1.82,-1.466) 2(1.82,-0.366) 3(1.82,0.734) 4(1.82,1.834) 5(1.82,2.934) 6(1.82,4.034) 7(1.82,5.134) 8(1.82,6.234) 9(1.82,7.334)
  rect 1.4x1 smd: 10(1.32,8.634)
  rect 2.2x1.2 smd: 11(-8.28,8.534) 12(-8.28,-6.966)
  rect 1.4x1.6 smd: 13(1.32,-6.066)
  Keep-Out Layer circle w0.203: c-8.68,5.734 r0.5
  Keep-Out Layer circle w0.203: c-8.68,-2.266 r0.5
  silkscreen extent -12.7,-6.37 1.12,8.13
USB-D [mm]
  rect 1.27x1.4 hole 0.85: 1(3.5,-2.49) 5(3.5,0.13)
  oval 1.27x1.4 hole 0.85: 2(1,-2.49) 3(-1,-2.49) 4(-3.5,-2.49) 6(1,0.13) 7(-1,0.13) 8(-3.5,0.13)
  round 3.5 hole 2.3: 9(6.57,-2.84) 10(-6.57,-2.84) 11(6.57,2.84) 12(-6.57,2.84)
  silkscreen extent -7.55,-3.88 7.55,13.12
VH3.96-2P-SMT [mm]
  rect 1.5x4 smd: 0(-3.1,-10.5) 0(7.06,-10.5)
  rect 2.5x5 smd: 1(3.96,0) 2(0,0)
  silkscreen extent -4.06,-12.7 8,-1.52

## Part data
BT1: library part 电池
C1 C2 C6 C7 C11 C12 C13 C14 C17 C18 C19 C22 C23 C24 C25 C27 C28 C30 C31 C32 C34 C35 C37 C38 C39 C40 C41 C42 C43 C44 C45 C46 C47 C48 C49 C50 C52 C53 C54 C55 C56 C86 C87 C88 C109 C110 C111 C112 C113 C114 C115 C116 C117 C118 C119: library part 电容, "电容"
C3: library part "Cap Pol3", "Polarized Capacitor (Surface Mount)"
C4 C8 C9 C10 C57 C58 C59 C60 C61 C62 C63 C64: "Capacitor"
C5: "Polarized Capacitor (Surface Mount)"
C29 C36: library part 直插电解电容, "直插电解电容"
C65 C84: library part ELECTRO
C66 C67 C68 C69 C70 C71 C72 C73 C74 C75 C76 C77 C78 C79 C80 C81 C82 C83 C85: library part CAP
D1 D2 D7 D11 D12 D13 D14 D15: library part SS24
D4 D9 D10: "SCHOTTKY DIODE"
D6 D16 D17 D18 D19 D20 D21 D22 D23 D24 D25 D26 D27 D28 D29 D30 D31 D32 D33 D34 D35 D36 D37: library part 电感
DW1 DW2: library part 肖特基二极管
F1: library part "Fuse Thermal", "Thermal Fuse"
F2: library part FUSE, "贴片自恢复保险丝"
J1 J2: "ASTRON B2B Connector"
J4: library part "Header 3X2", "Header, 3-Pin, Dual row"
J7 J8: "USB DOUBLE PORTS"
J9: "小USB插痤"
J21: library part MINIPCIE, "MPC24-52K3311"
K1: library part 按键, "按键"
L4: library part 电感, "电感"
L7 L8 L9 L10: library part INCLUDE
L11: library part 功率电感
P1: library part "Header 15X2", "Header, 15-Pin, Dual row"
P2 P10: library part "Header 2X2", "Header, 2-Pin, Dual row"
P4 P6 P9: library part "Header 2", "Header, 2-Pin"
P5: "Header, 6-Pin"
R1 R2 R5: "Semiconductor Resistor"
R3 R37 R38 R39 R40 R41 R42 R43 R44: "Resistor"
R4 R6 R7 R8 R9 R10 R11 R12 R13 R14 R15 R16 R17 R18 R19 R20 R21 R22 R23 R24 R25 R26 R27 R28 R29 R30 R31 R32 R33 R34 R35 R36 R54 R55 R58 R59 R60 R61 R87 R88 R89 R90 R93 R104 R105 R112 R113 R114 R115 R116: library part 电阻, "电阻"
R45 R46 R47 R48 R49 R50 R51 R52 R53 R56 R57 RS1 RS2: library part RES
U5 U8: library part MAX232ESE
U6: library part USB2514, "USB2514Bi"
U10: library part TPA3116D2
U25: "I2C interface RTC with crystal built-in"
X1: library part 表贴晶体, "4PIN表贴晶体"

## Free pads (board coordinates)
  round 196.85 hole 118.11: 0(-1.52,0) 0(1848.87,-4094.49) 0(6022.1,-4094.49) 0(6022.1,0)

## Via types
v1: diameter 20, hole 12, Top Layer to Bottom Layer, 137 vias
v2: diameter 22, hole 14, Top Layer to Bottom Layer, 44 vias
v3: diameter 23, hole 13, Top Layer to Bottom Layer, 35 vias
v4: diameter 24, hole 14, Top Layer to Bottom Layer, 34 vias
v5: diameter 25, hole 14, Top Layer to Bottom Layer, 26 vias
v6: diameter 22, hole 13, Top Layer to Bottom Layer, 22 vias
v7: diameter 22, hole 12, Top Layer to Bottom Layer, 19 vias
v8: diameter 30, hole 22, Top Layer to Bottom Layer, tented top, 15 vias
v9: diameter 25, hole 15, Top Layer to Bottom Layer, 11 vias
v10: diameter 22, hole 18, Top Layer to Bottom Layer, 6 vias
v11: diameter 25, hole 16, Top Layer to Bottom Layer, 5 vias
v12: diameter 24, hole 13, Top Layer to Bottom Layer, 5 vias
v13: diameter 20, hole 15, Top Layer to Bottom Layer, 5 vias
v14: diameter 26, hole 15, Top Layer to Bottom Layer, 4 vias
v15: diameter 18, hole 10, Top Layer to Bottom Layer, 4 vias
v16: diameter 20, hole 14, Top Layer to Bottom Layer, 4 vias
v17: diameter 28, hole 16, Top Layer to Bottom Layer, 3 vias
v18: diameter 28, hole 15, Top Layer to Bottom Layer, 2 vias
v19: diameter 30, hole 15, Top Layer to Bottom Layer, 2 vias
v20: diameter 32, hole 16, Top Layer to Bottom Layer, 1 vias
v21: diameter 26, hole 14, Top Layer to Bottom Layer, 1 vias
v22: diameter 30, hole 16, Top Layer to Bottom Layer, 1 vias

## Nets (pads, with @x,y where several pads share a name; then routed paths per layer and width w, separated by ;. In a path a pad name is that pad's centre, name@x,y a point inside that pad or via, vN(x,y) a via of type N, cw(c..) or ccw(c..) an arc to the next point about the centre after c; other vN are vias at no path point)
485_A: D17.2 P2.3 R16.1 R17.2 U3.6 | length 2337
  Top Layer w10: U3.6@4344.8,-1928 4394,-1928 4411,-1945 4411,-2682 4391,-2702 4391,-2916 4418,-2943 5011,-2943 5052,-2984 5321.48,-2984 5340.48,-2965 5539,-2965 P2.3@5610,-3036
485_B: D16.2 P2.1 R15.1 R16.2 U3.7 | length 2138.4
  Top Layer w10: U3.7@4344.8,-1878 4411,-1878 4432,-1899 4432,-2694 4411,-2715 4411,-2899 4435,-2923 5292,-2923 5335,-2880 P2.1@5417,-2880
485_DE1: U3.2 U3.3 U4.4 | length 249.5
  Top Layer w12: U3.2@4114.48,-1878 U3.3@4114.48,-1928 4169.48,-1928 4186.25,-1944.77 U4.4@4186.25,-2065.6
+12V: C3.1 F1.2 U1.2 | length 734.1
  Top Layer w40: 4598.48,-1705 U1.2@4655.17,-1705
  Top Layer w85: 4543.48,-1735 4543.48,-2140 4573.48,-2170 4803.48,-2170
AU_MUTE: J1.71 R56.1 R57.2 | length 3082.1
  Top Layer w10: R56.1@854.48,-2433 R57.2@904.48,-2433 904.48,-2368 919.48,-2353 v6(1384.48,-2353) ; J1.71@3599.48,-2597.25 v6(3599.48,-2533)
  Bottom Layer w10: v6(1384.48,-2353) 1424.48,-2393 1754.48,-2393 1819.48,-2328 3519.48,-2328 3549.48,-2358 3549.48,-2483 v6(3599.48,-2533)
AUGND: C65.2 C66.2 C70.1 C72.2 C73.1 C76.1 C80.2 C83.2 C84.2 D12.A D13.A D14.A D15.A J2.98 L2.2 R48.2 R50.2 R53.2 U10.1 U10.9 U10.13 U10.14 U10.15 U10.22 U10.25 U10.28 U10.33 | length 4851.3
  Top Layer w12: v1(714.48,-2423) R53.2@739.48,-2423 ; U10.22@1053.48,-2940.18 U10.33@1053.48,-2860 ; U10.33@1104.76,-2754 U10.9@1104.76,-2648 ; U10.25@1130.35,-2943.28 U10.33@1130.35,-2868 ; U10.33@1196.48,-2868 1207.12,-2878.64 U10.28@1207.12,-2943.28
  Top Layer w15: R50.2@1124.48,-2433 C73.1@1175.48,-2433 ; v4@1396.48,-2418 R48.2@1434.48,-2418
  Top Layer w30: 1711.48,-2409 1782.48,-2338 2530.48,-2338 2578.48,-2290 2578.48,-1770 2648.48,-1700 3817.48,-1700 3877.48,-1640 4063.48,-1640 4511.8,-1191.69 4511.8,-652.97 4492.82,-634 4359.48,-634 4339.8,-653.69 J2.98@4339.8,-713.94
  other v1: 1059.48,-2858 1099.48,-2858 1139.48,-2858 1179.48,-2858 1059.48,-2828 1099.48,-2828 1139.48,-2828 1179.48,-2828 1059.48,-2798 1099.48,-2798 1139.48,-2798 1179.48,-2798 1059.48,-2768 1099.48,-2768 1139.48,-2768 1179.48,-2768 1059.48,-2738 1099.48,-2738 1139.48,-2738 1179.48,-2738
  other v2: 309.48,-2943 329.48,-2943 349.48,-2943
  other v3: 1720,-2890 1745,-2890 1729.48,-2458 1729.48,-2438 1729.48,-2418
  other v4: 629.48,-3633 629.48,-3608 1149.48,-2433 1395.48,-2418
  other v5: 1770,-2890
  other v6: 1137.48,-3656 1664.48,-3640 1126.48,-3637 1148.48,-3637 1664.48,-3618
BAT_RTC: J2.94 | length 0.4
  Top Layer w8: J2.94@4239.48,-714.26 J2.94@4239.8,-713.94
BG_EN: J1.73 R42.2 | length 4627
  Top Layer w10: R42.2@104.48,-3178 104.48,-2353 154.48,-2303 v6(1544.48,-2303) ; J1.73@3652,-2599.77 v6(3651.98,-2535.5)
  Bottom Layer w10: v6(1544.48,-2303) 3544.48,-2303 3579.48,-2338 3579.48,-2463 v6(3651.98,-2535.5)
BG_PWM: J1.75 R40.2 | length 4809.4
  Top Layer w10: R40.2@4.48,-3178 4.48,-2338 64.48,-2278 v6(1574.48,-2278) ; v6(3696.98,-2535.5) 3696.98,-2594.75 J1.75@3702,-2599.77
  Bottom Layer w10: v6(1574.48,-2278) 3574.48,-2278 3614.48,-2318 3614.48,-2453 v6(3696.98,-2535.5)
CAN1_N: C14.2 DW2.K P10.1 R6.1 U7.6 | length 755.4
  Top Layer w12: U7.6@4823.48,-2770 5038.48,-2770 5053.48,-2755 5053.48,-2659.52 5070,-2643 5182,-2643 DW2.K@5233.48,-2591.52 ; DW2.K@5267.74,-2550 5338,-2550 P10.1@5409,-2479
  Top Layer w15: DW2.K@5233.48,-2591.52 DW2.K@5233.48,-2565 ; DW2.K@5254.74,-2537 DW2.K@5267.74,-2550
CAN1_P: C13.2 DW1.K P10.3 R6.2 U7.7 | length 1181.2
  Top Layer w12: U7.7@4826,-2720 5013.48,-2720 5030,-2703.48 5030,-2585 5052,-2563 5132,-2563 5294,-2401 5456,-2401 5505,-2450 5505,-2605 5530,-2630 P10.3@5620,-2630
CAN1_RX: J2.12 R7.1 R12.2 | length 4359.2
  Top Layer w10: v1(2168.48,-795) 2189.8,-773.69 J2.12@2189.8,-713.94 ; v1(2743.48,-1770) 3873.48,-1770 3928.48,-1715 4423.48,-1715 4453.48,-1745 4453.48,-2761 R7.1@4520,-2761
  Bottom Layer w10: v1(2168.48,-795) 2168.48,-1585 2298.48,-1715 2688.48,-1715 v1(2743.48,-1770)
CAN1_TX: J2.10 U7.1 | length 4432.1
  Top Layer w10: v1@2139.8,-796.31 J2.10@2139.8,-713.94 ; v1(2683.48,-1745) 3858.48,-1745 3913.48,-1690 4438.48,-1690 4478.48,-1730 4478.48,-2645 4503.48,-2670 4658.48,-2670
  Bottom Layer w10: v1(2138.48,-795) 2138.48,-1600 2283.48,-1745 v1(2683.48,-1745)
CAN2_RX: J2.7
CAN2_TX: J2.9
CCM_CLKO2: J2.36
CLK1_N: C114.1 J2.83 | length 4038.5
  Top Layer w7: C114.1@544.48,-1608 544.48,-1589 591.48,-1542 591.48,-1481.37 633.85,-1439 3849.48,-1439 3884.48,-1404 3884.48,-1222 v1(3884.48,-1203) ; v1@3973.48,-948 3974.48,-948 3990.48,-932 J2.83@3990.48,-897
  Bottom Layer w7: v1(3884.48,-1203) 3893.98,-1193.5 3921.11,-1193.5 3970.48,-1144.13 3970.48,-951 v1@3973.48,-948
  other v1: 3979.48,-948
CLK1_P: C115.1 J2.81 | length 4068.3
  Top Layer w7: C115.1@654.48,-1608 654.48,-1589 607.48,-1542 607.48,-1488 640.48,-1455 3856.11,-1455 3900.48,-1410.63 3900.48,-1222 3909.48,-1213 3909.48,-1188 3889.48,-1168 v1(3884.48,-1168) ; v1(3938.48,-934) 3939.8,-932.69 J2.81@3939.8,-891
  Bottom Layer w7: v1(3884.48,-1168) 3893.98,-1177.5 3914.48,-1177.5 3954.48,-1137.5 3954.48,-950 v1(3938.48,-934)
CLK1O_N: C114.2 J21.11 R87.2 | length 603.2
  Top Layer w8: J21.11@524.48,-2153 524.48,-2114 641.48,-1997 641.48,-1793 550.48,-1702 C114.2@550.48,-1675
  Top Layer w15: 505.48,-1668 C114.2@544.48,-1668
CLK1O_P: C115.2 J21.13 R88.2 | length 565.1
  Top Layer w8: J21.13@557.48,-2151 557.48,-2111 661.48,-2007 C115.2@661.48,-1679
  Top Layer w15: R88.2@599.48,-1668 C115.2@649.48,-1668
CSI0_HSYNCH: J2.37
CSI0_PIXCLK: J2.38
CSI_CLK0_N: J2.61
CSI_CLK0_P: J2.63
CSI_D0_N: J2.71
CSI_D0_P: J2.69
CSI_D1_N: J2.67
CSI_D1_P: J2.65
D_RXD: D18.1 J3.2 U8.8 | length 701.3
  Top Layer w10: U8.8@5293.48,-705 5293.48,-675 5303.48,-665 5473.48,-665 5486,-677.52 5486,-932.52 5508.48,-955 5636,-955 J3.2@5675,-916
D_TXD: D19.1 J3.3 U8.7 | length 741.5
  Top Layer w10: U8.7@5297.24,-758.09 5240.57,-758.09 5226.48,-744 5226.48,-657 5243.48,-640 5488.48,-640 5513.48,-665 5513.48,-757.48 5525,-769 5636,-769 J3.3@5674,-807
DISP0_CLK: J1.32
DISP0_CNTRST: J1.2
DISP0_DAT0: J1.26
DISP0_DAT1: J1.25
DISP0_DAT2: J1.24
DISP0_DAT3: J1.23
DISP0_DAT4: J1.22
DISP0_DAT5: J1.21
DISP0_DAT6: J1.20
DISP0_DAT7: J1.19
DISP0_DAT8: J1.18
DISP0_DAT9: J1.17
DISP0_DAT10: J1.16
DISP0_DAT11: J1.15
DISP0_DAT12: J1.14
DISP0_DAT13: J1.13
DISP0_DAT14: J1.12
DISP0_DAT15: J1.11
DISP0_DAT16: J1.10
DISP0_DAT17: J1.9
DISP0_DAT18: J1.8
DISP0_DAT19: J1.7
DISP0_DAT20: J1.6
DISP0_DAT21: J1.5
DISP0_DAT22: J1.4
DISP0_DAT23: J1.3
DISP0_DRDY: J1.30
DISP0_HSYNCH: J1.27
DISP0_VSYNCH: J1.28
EARTH: J3.BO1 J3.BO2 J5.15 J5.16 J6.BO1 J6.BO2 J7.9 J7.10 J7.11 J7.12 J8.9 J8.10 J8.11 J8.12 J9.6 J9.7 J9.8 J9.9 J10.10 J10.11 J10.12 J10.13 L3.2 P4.0 P5.0 P7.0 P8.0 P9.0 pad.0@1848.87,-4094.49 pad.0@6022.1,0 pad.0@6022.1,-4094.49
ECSPI1_CLK: J1.66
ECSPI1_CS1: J1.68
ECSPI1_MISO: J1.63
ECSPI1_MOSI: J1.61
ECSPI5_CLK: J1.72
ECSPI5_CS0: J1.70
ECSPI5_MISO: J1.65
ECSPI5_MOSI: J1.67
EIM_BCLK: J1.35
EIM_CS0: J1.55
EIM_CS1: J1.56
EIM_DA0: J1.54
EIM_DA1: J1.53
EIM_DA2: J1.52
EIM_DA3: J1.51
EIM_DA4: J1.50
EIM_DA5: J1.49
EIM_DA6: J1.48
EIM_DA7: J1.47
EIM_DA8: J1.46
EIM_DA9: J1.45
EIM_DA11: J1.43
EIM_DA13: J1.41
EIM_DA15: J1.39
EIM_DATA0: J2.40
EIM_DATA1: J2.39
EIM_DATA2: J2.42
EIM_DATA3: J2.41
EIM_DATA4: J2.44
EIM_DATA5: J2.43
EIM_DATA6: J2.46 R61.1 | length 1963.2
  Top Layer w10: J2.46@3039.8,-713.94 3039.8,-622.69 3077.48,-585 3843.48,-585 3947.48,-481 4797.48,-481 4808.44,-470.04 R61.1@4808.44,-430
EIM_DATA7: J2.45
EIM_DATA8: J2.48 R32.2 | length 2036.2
  Top Layer w10: J2.48@3089.8,-713.94 3089.8,-629.69 3113.48,-606 3862.48,-606 3969.48,-499 4909.48,-499 4919.48,-489 R32.2@4919.48,-425
EIM_DATA9: J2.47 R60.1 | length 2469.4
  Top Layer w10: J2.47@3089.8,-867.49 3089.8,-806.69 3116.48,-780 v1@3914.48,-780 ; v1(3912.48,-628) 4001.48,-539 5184.48,-539 5194.48,-529 R60.1@5194.48,-430
  Bottom Layer w10: v1(3912.48,-628) 3912.48,-776 v1(3914.48,-778)
EIM_DATA10: J2.50 R54.1 | length 2090.8
  Top Layer w10: J2.50@3139.8,-713.94 3139.8,-649.69 3162.48,-627 3877.48,-627 3985.48,-519 5019.48,-519 5028.48,-510 R54.1@5028.48,-430
EIM_DATA11: J2.49 R55.2 | length 2559.5
  Top Layer w10: J2.49@3139.8,-867.49 3139.8,-812.69 3151.48,-801 v1@3963.48,-801 ; v1(3964.48,-612) 3964.48,-606 4010.48,-560 5293.48,-560 5303.48,-550 R55.2@5303.48,-430
  Bottom Layer w10: v1(3964.48,-800) v1(3964.48,-612)
EIM_DATA12: J2.52
EIM_DATA13: J2.51
EIM_DATA14: J2.54
EIM_DATA15: J2.53
EIM_EB0: J1.64
EIM_EB1: J1.57
EIM_LBA: J1.62
EIM_OE: J1.58
EIM_RW: J1.60
EIM_WAIT: J1.37
GAIN: R49.1 R50.1 U10.8 | length 142.8
  Top Layer w10: R50.1@1116.48,-2494 1116.48,-2585 1130.48,-2599 U10.8@1130.48,-2631